# Altium PCB ESP32_BDB.PcbDoc (part 1 of 2)
Units mil, origin at the board's own origin, x right, y up, seen from the top; angles counter-clockwise.
Board outline 3000 x 3000 mil, 4 copper layers (Top Layer, Layer 1, Layer 2, Bottom Layer), stack 62.449 mil thick; 80 components, 64 nets, 287 pads, 205 vias.
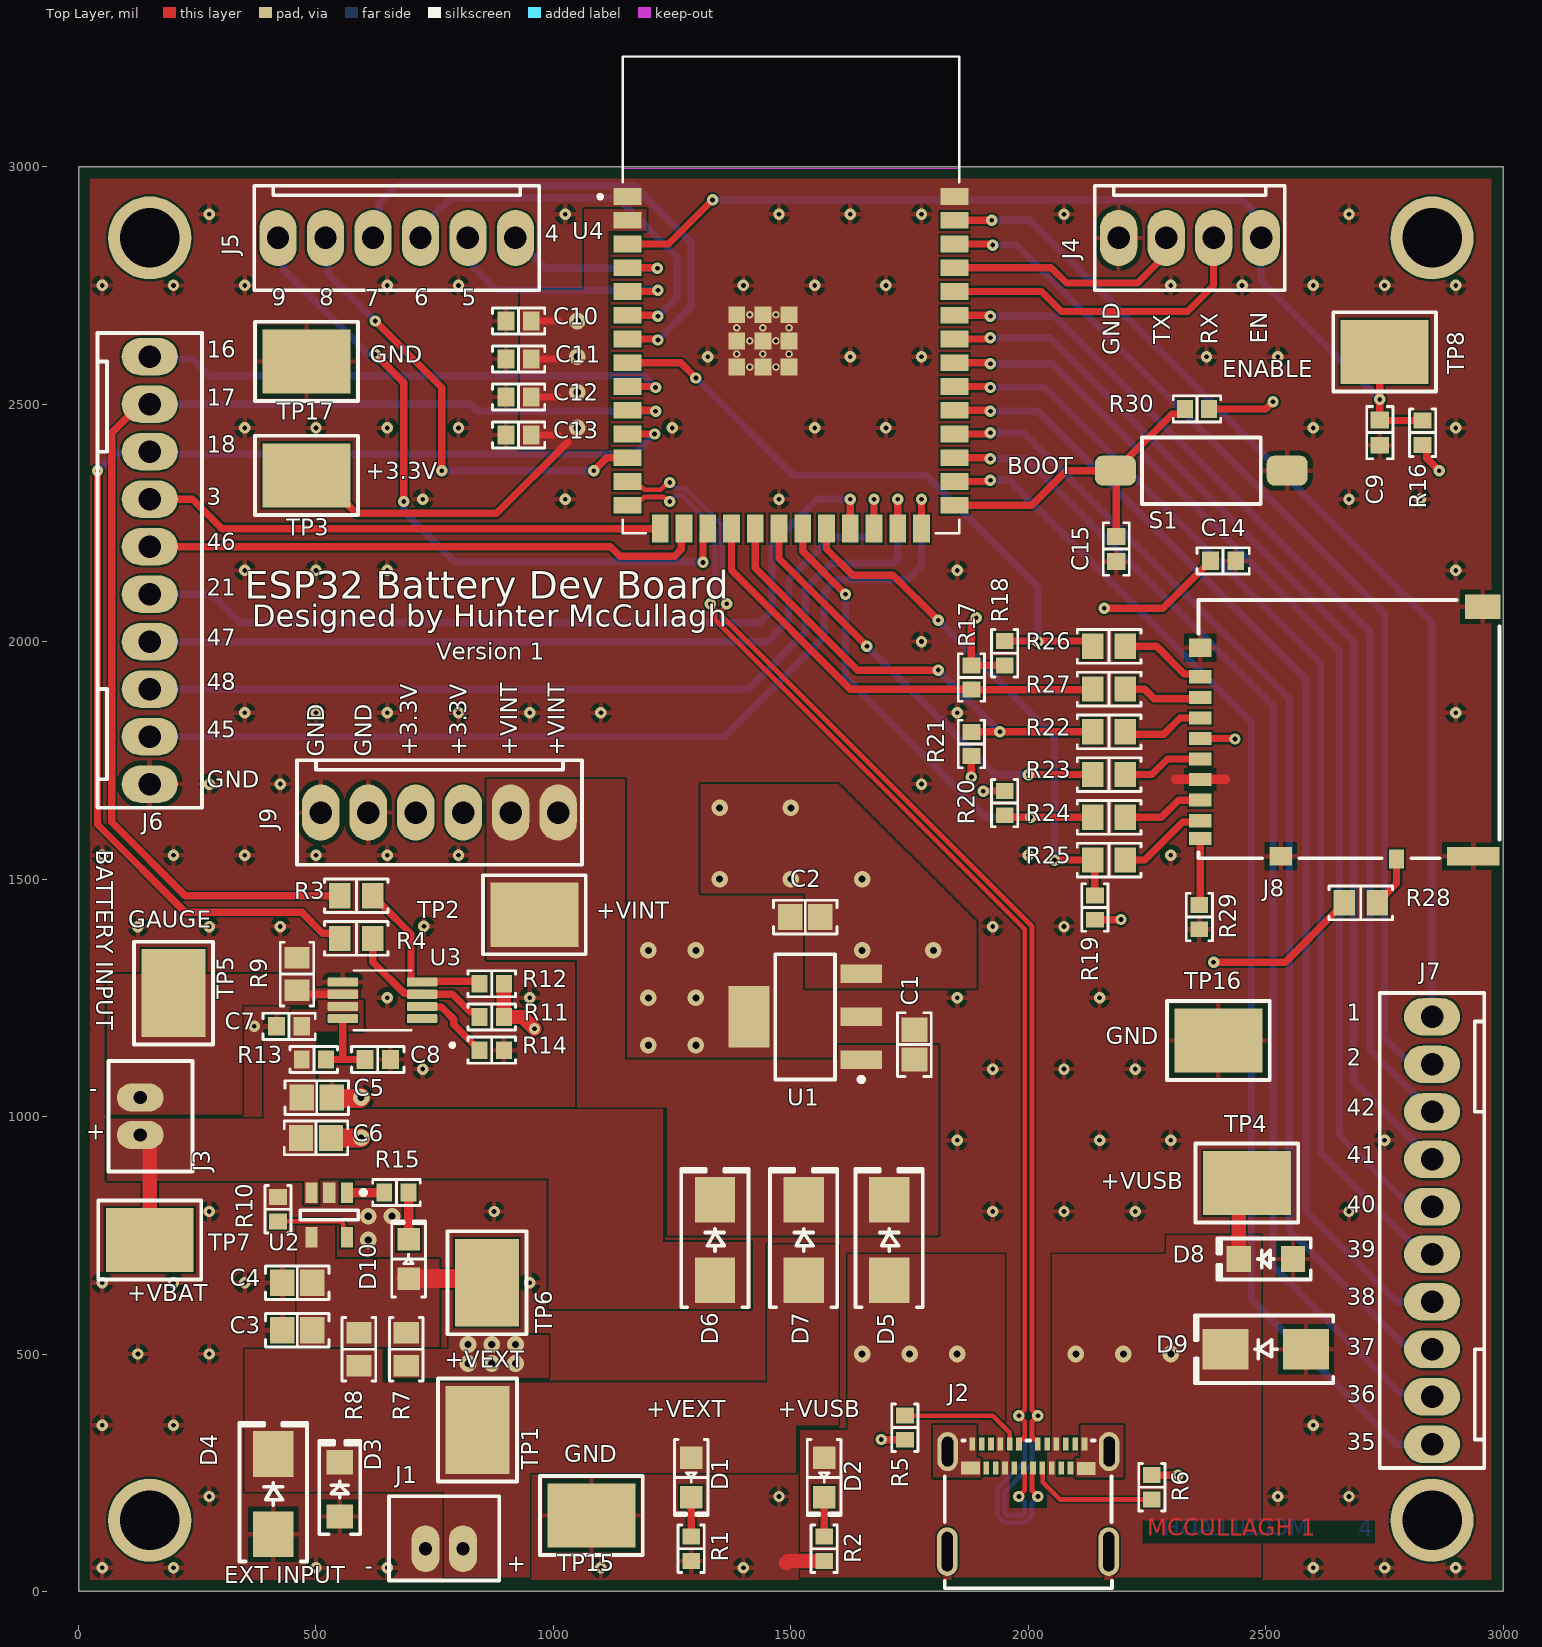
[diagram p0: Top Layer view]
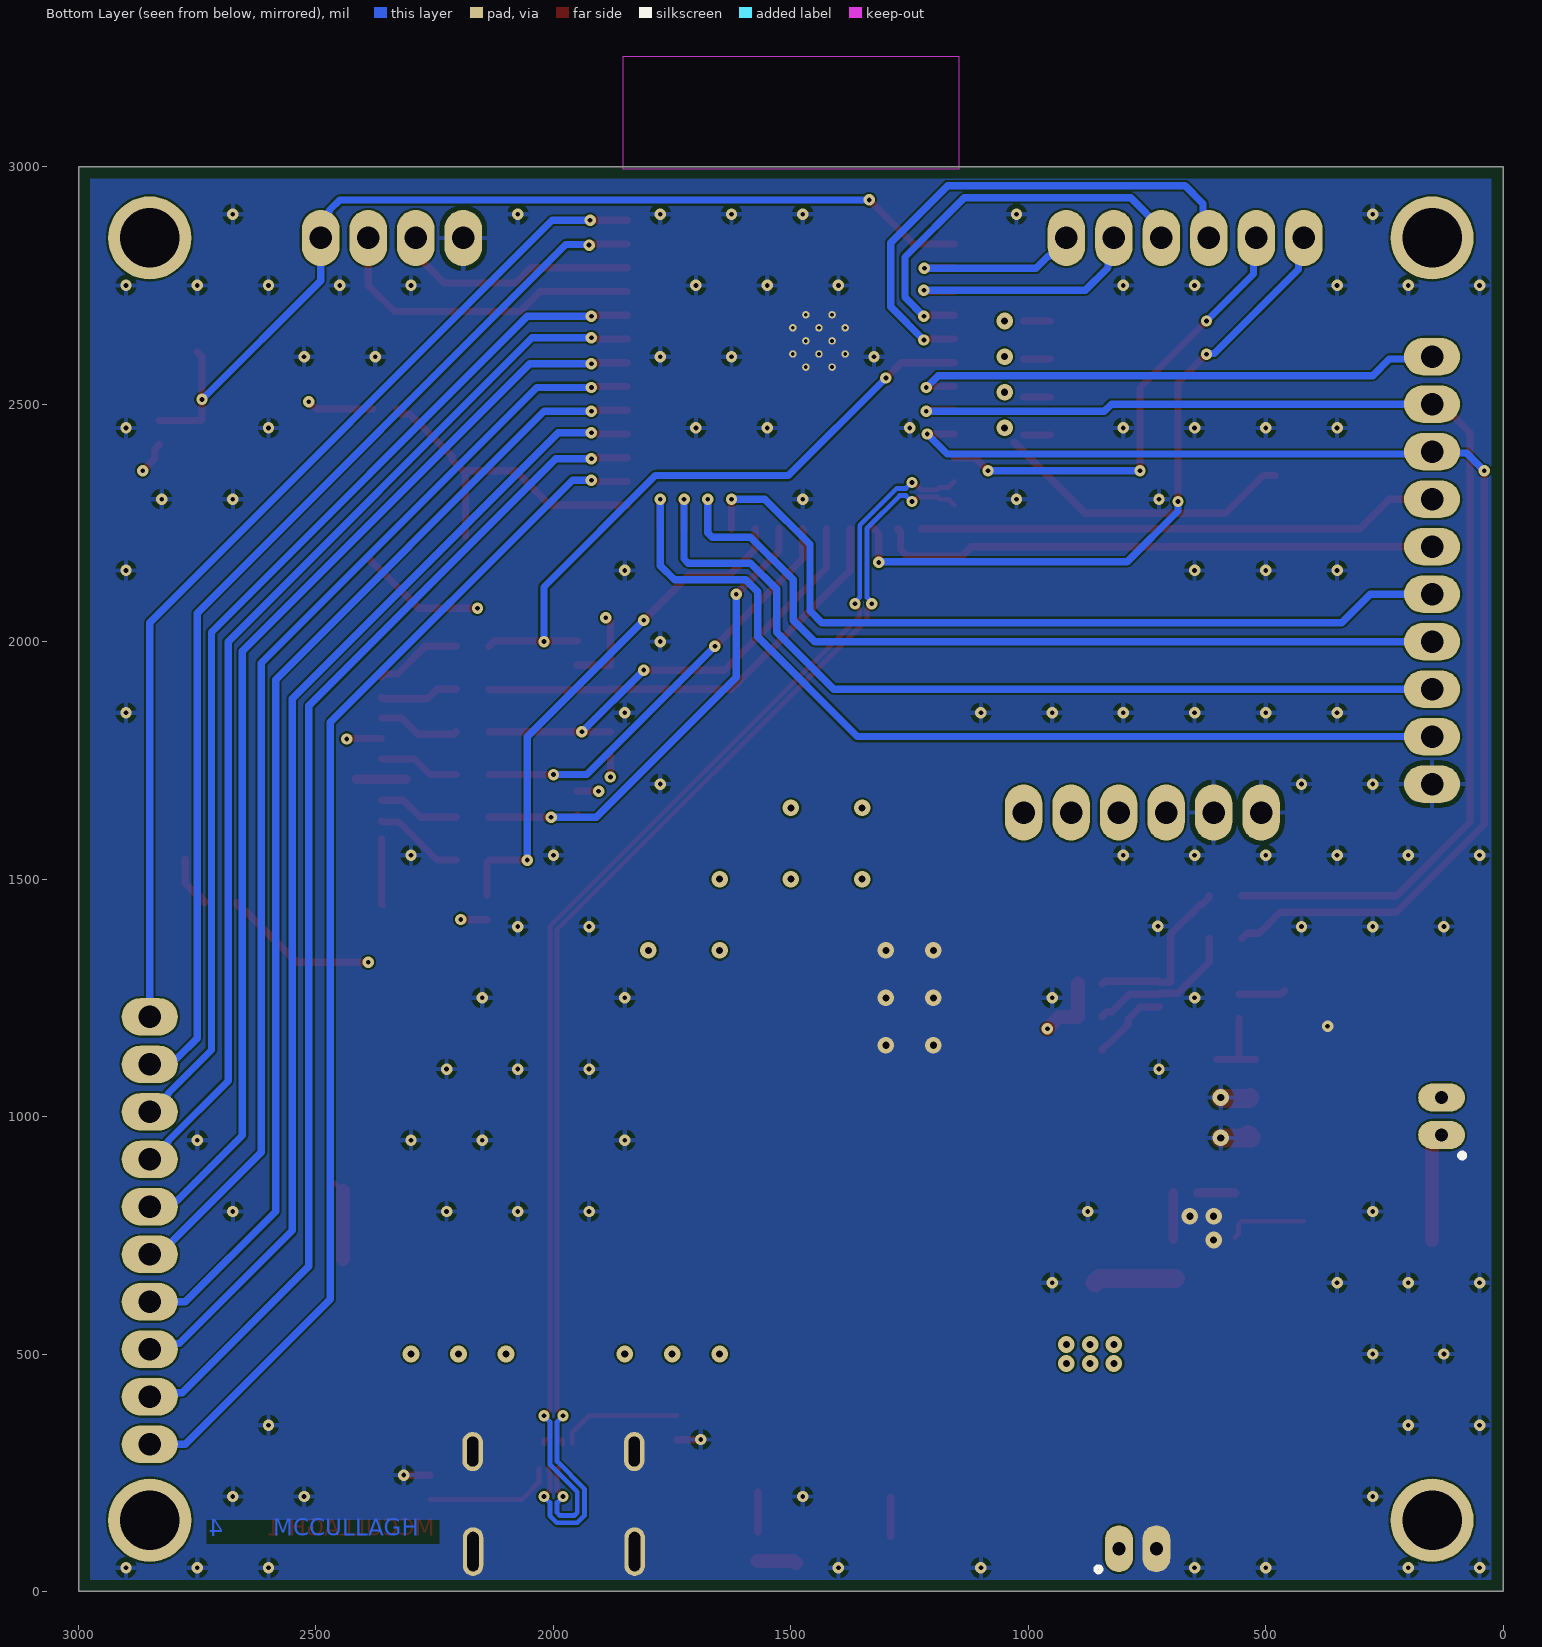
[diagram p1: Bottom Layer view, seen from below]
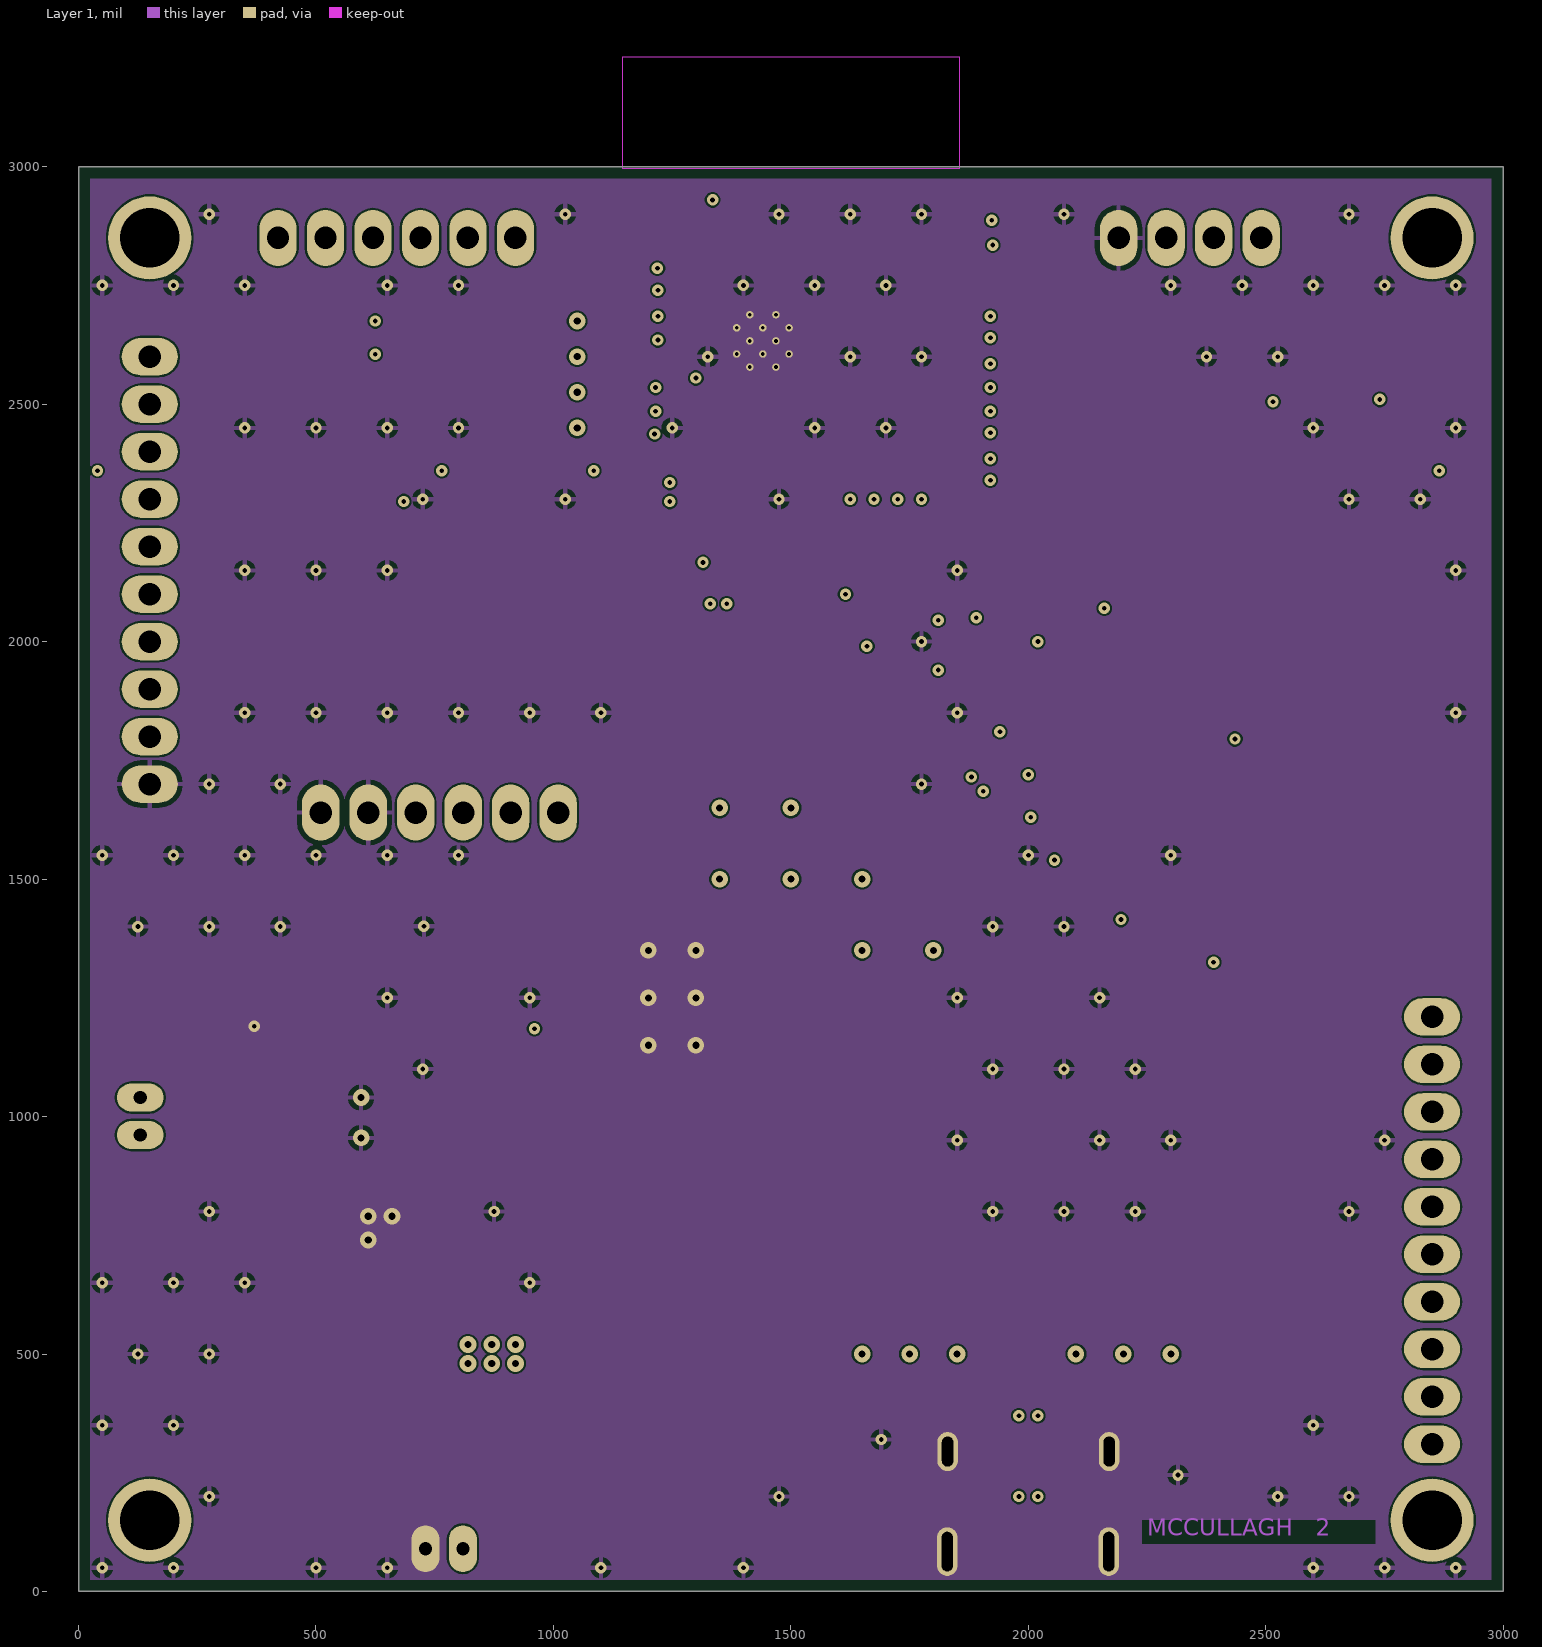
[diagram p2: Layer 1]
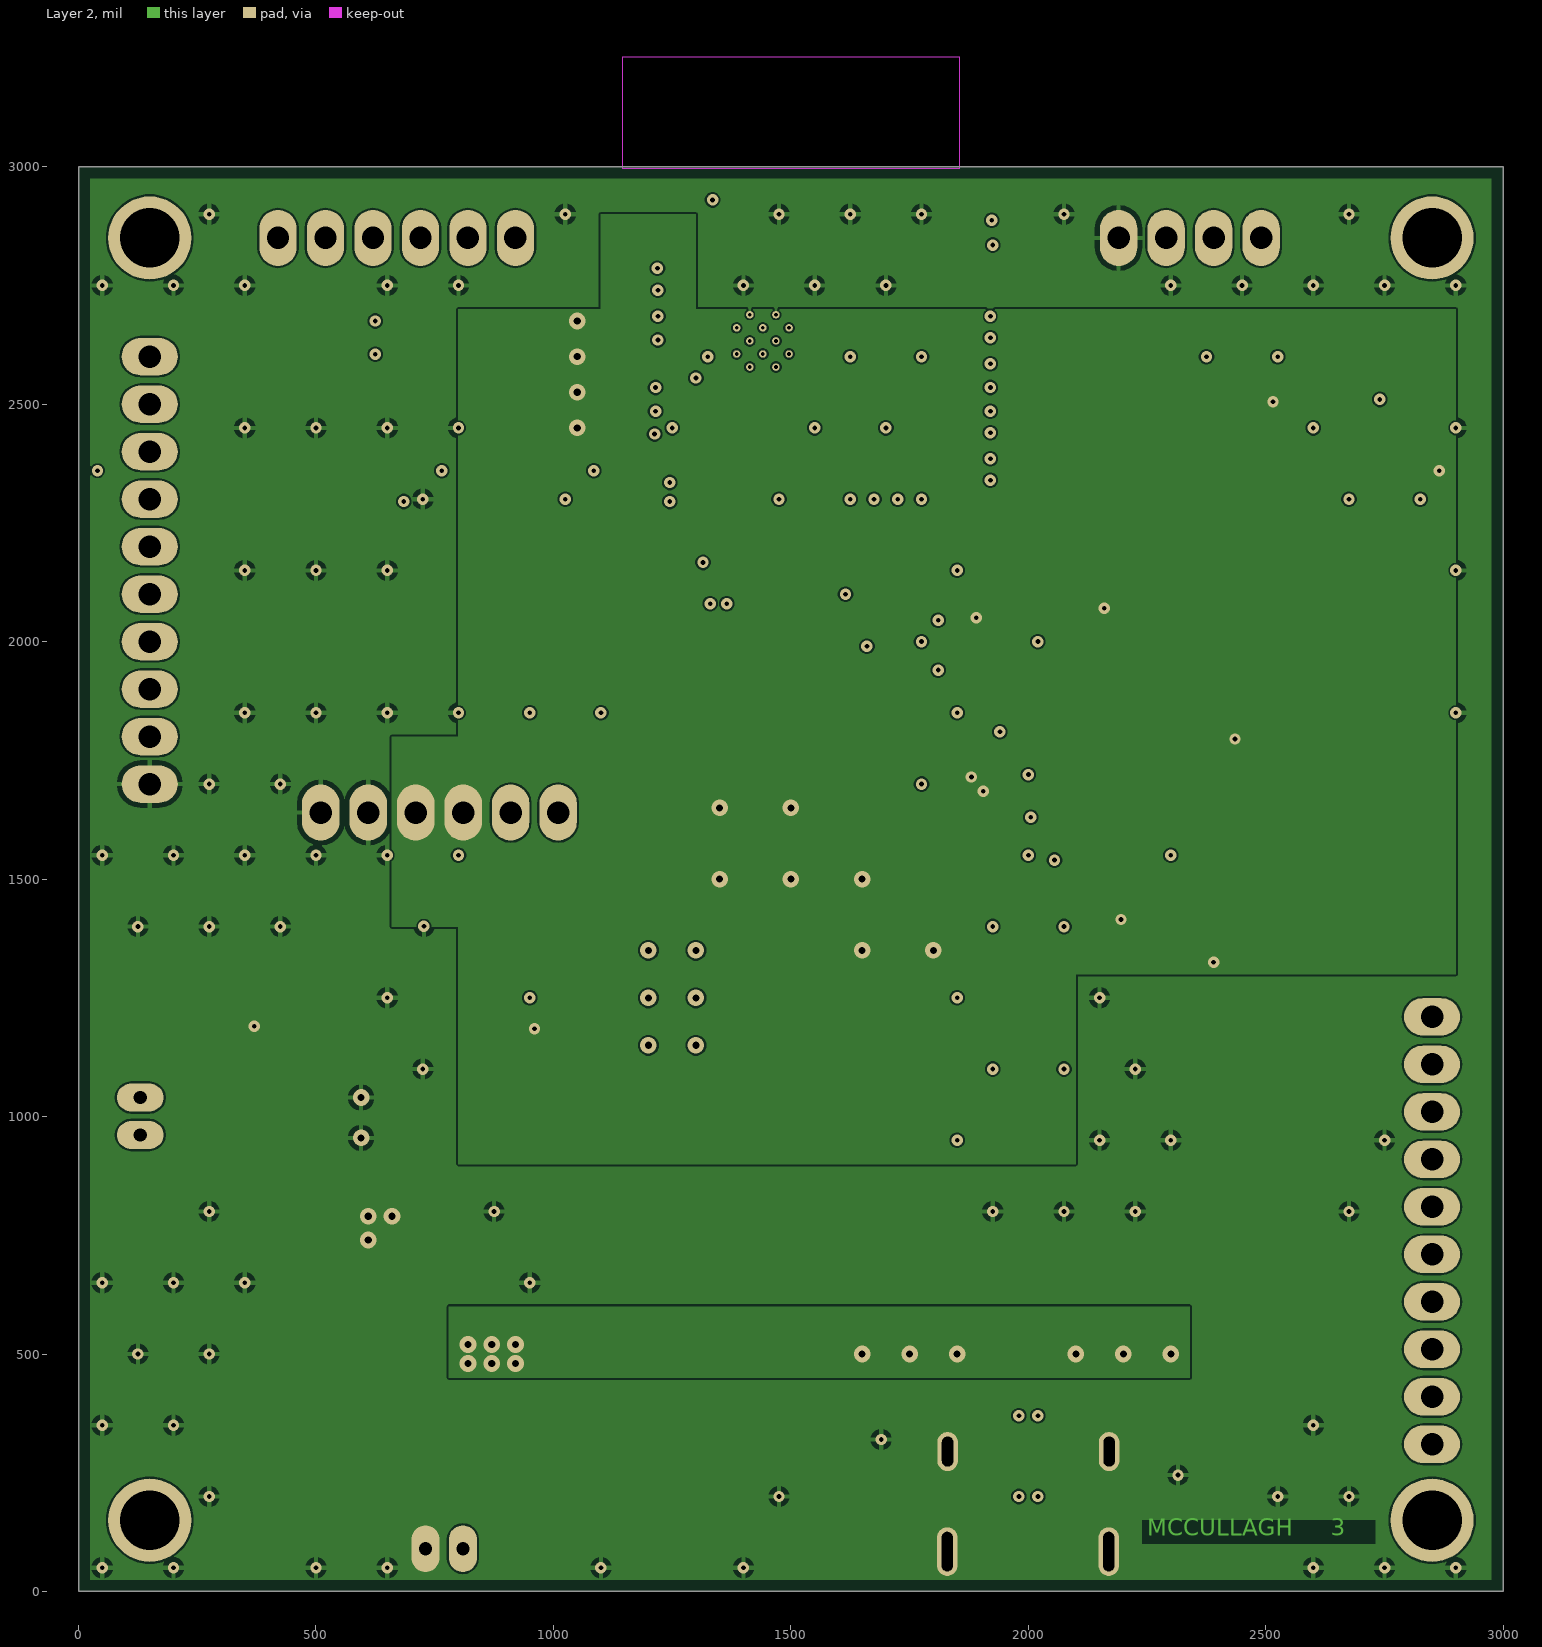
[diagram p3: Layer 2]
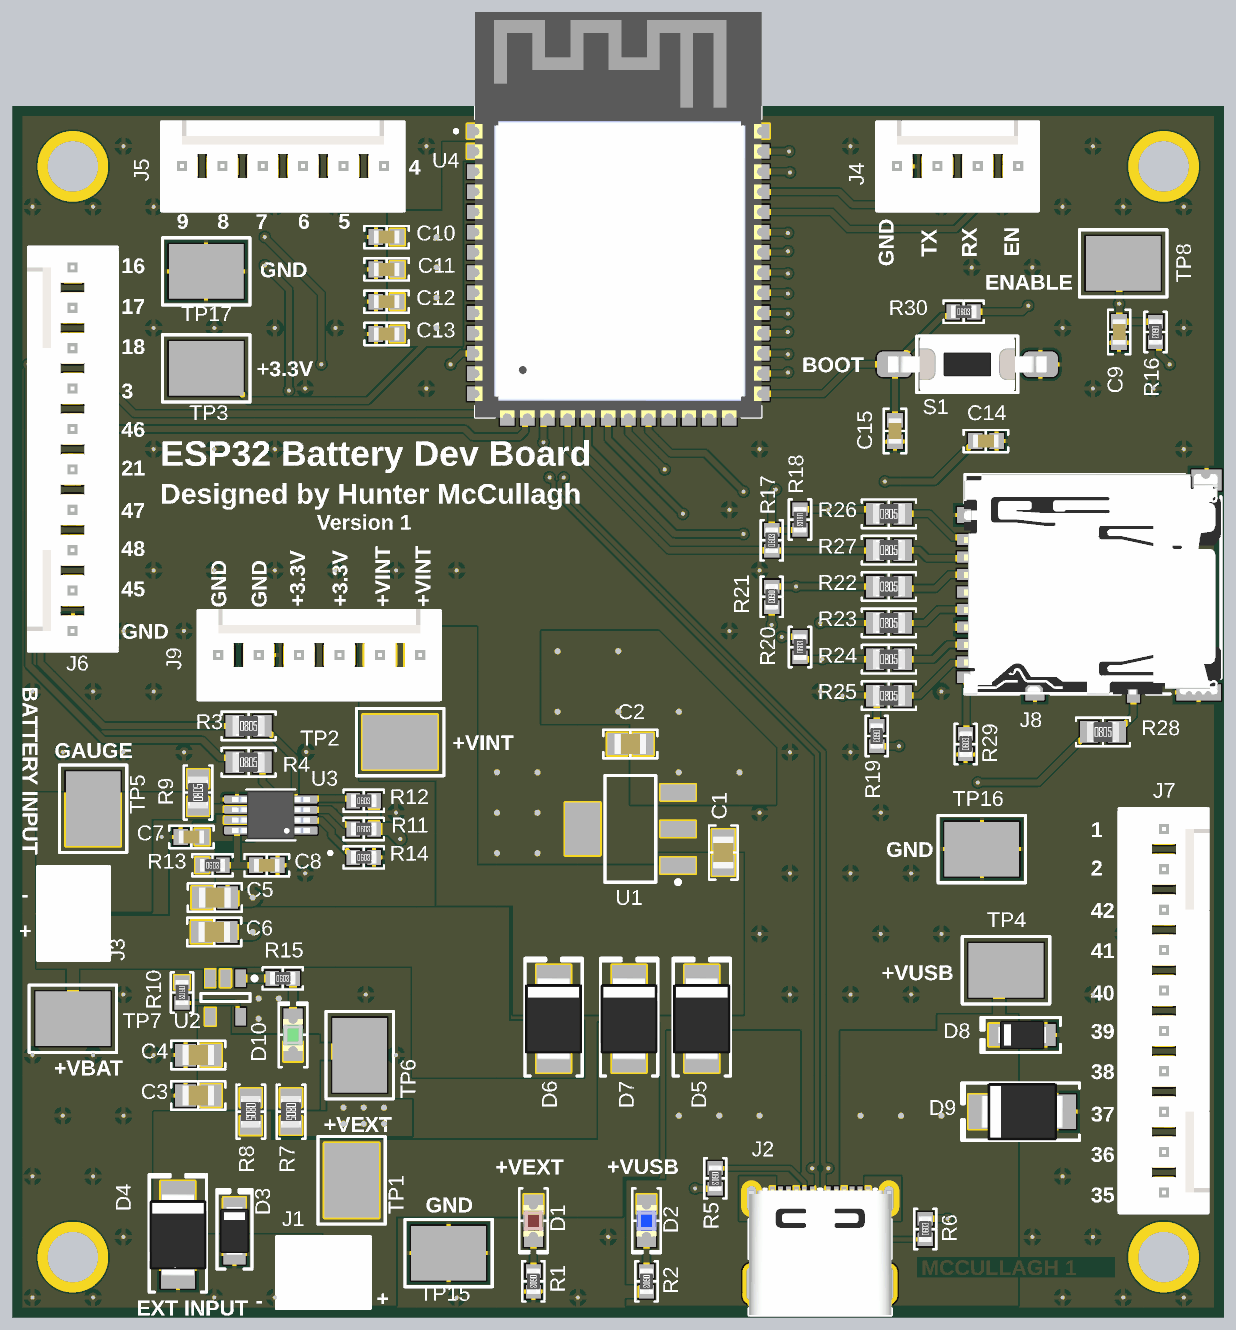
[diagram p4: 3D render of the assembled board from above, using the file's embedded part models]

## Layer stack, top to bottom
Top Solder: solder mask 0.4, Solder Resist, Dk 3.5
Top Layer: signal copper 1.378
Dielectric 2: prepreg 8.284, PP-006, Dk 4.1
Layer 1: signal copper 0.598
Dielectric 1: core 41.929, FR-4, Dk 4.8
Layer 2: signal copper 0.598
Dielectric 3: prepreg 8.284, PP-006, Dk 4.1
Bottom Layer: signal copper 1.378
Bottom Solder: solder mask 0.4, Solder Resist, Dk 3.5

## Board outline
0,0 3000,0 3000,3000 0,3000

## Design rules (kind name [scope] priority, off if disabled: settings)
Clearance [All] p1: gap=5 ignorepadtopadclearanceinfootprint=FALSE except(4: Arc-Poly Track-Poly SMDPad-Poly THPad-Poly Via-Poly Fill-Poly Poly-Poly)
DiffPairsRouting "Schematic Differential Pairs Routing_1" [InNet('D_P')] p1: maxlimit=5 minlimit=5 mostfreqgap=5 toplayer_minwidth=10.26 toplayer_maxwidth=10.26 toplayer_prefwidth=10.26 midlayer1_minwidth=6.27 midlayer1_maxwidth=6.27 midlayer1_prefwidth=6.27 midlayer2_minwidth=6.27 midlayer2_maxwidth=6.27 midlayer2_prefwidth=6.27 bottomlayer_minwidth=10.26 bottomlayer_maxwidth=10.26 bottomlayer_prefwidth=10.26 impedanceprofiledriven=TRUE impedanceprofileid={8AA95D30-BFB7-47B4-9C3E-79D191246514} impedanceprofilevalue=90.000000 maxuncoupledlength=500
DiffPairsRouting "Schematic Differential Pairs Routing" [InNet('D_N')] p2: maxlimit=5 minlimit=5 mostfreqgap=5 toplayer_minwidth=10.26 toplayer_maxwidth=10.26 toplayer_prefwidth=10.26 midlayer1_minwidth=6.27 midlayer1_maxwidth=6.27 midlayer1_prefwidth=6.27 midlayer2_minwidth=6.27 midlayer2_maxwidth=6.27 midlayer2_prefwidth=6.27 bottomlayer_minwidth=10.26 bottomlayer_maxwidth=10.26 bottomlayer_prefwidth=10.26 impedanceprofiledriven=TRUE impedanceprofileid={8AA95D30-BFB7-47B4-9C3E-79D191246514} impedanceprofilevalue=90.000000 maxuncoupledlength=500
DiffPairsRouting [All] p3: maxlimit=10 minlimit=10 mostfreqgap=10 toplayer_minwidth=15 toplayer_maxwidth=15 toplayer_prefwidth=15 midlayer1_minwidth=15 midlayer1_maxwidth=15 midlayer1_prefwidth=15 midlayer2_minwidth=15 midlayer2_maxwidth=15 midlayer2_prefwidth=15 bottomlayer_minwidth=15 bottomlayer_maxwidth=15 bottomlayer_prefwidth=15 maxuncoupledlength=500
HoleSize [All] p1: absolutevalues=TRUE maxlimit=1000 minlimit=1 maxpercent=80.000 minpercent=20.000
MinimumSolderMaskSliver [All] p1: minsoldermaskwidth=1
PolygonConnect PolygonConnect_3 [All vs IsNamedPolygon('GND_L01_P013')] p1: connectstyle=Direct reliefconductorwidth=10 reliefentries=4 polygonreliefangle="90 Angle" airgapwidth=10
PolygonConnect PolygonConnect_2 [All vs IsNamedPolygon('GND_L01_P002')     or          IsNamedPolygon('GND_L01_P003')    or IsNamedPolygon('NETC3_2_L01_P006')       or IsNamedPolygon('BATTERY_GAUGE_L01_P010')] p2: connectstyle=Direct reliefconductorwidth=10 reliefentries=4 polygonreliefangle="90 Angle" airgapwidth=10
PolygonConnect PolygonConnect_1 [All vs InNet('+3v3')  or InNet('+VBAT') or InNet('+VEXT') or InNet('+VUSB') or InNet('+VINT') or InNet('BATTERY_GAUGE')   or InNet('NetC3_2')] p3: connectstyle=Direct reliefconductorwidth=10 reliefentries=4 polygonreliefangle="90 Angle" airgapwidth=10
PolygonConnect [All] p4: connectstyle=Relief reliefconductorwidth=10 reliefentries=4 polygonreliefangle="90 Angle" airgapwidth=10
RoutingVias [All] p1: holewidth=28 width=50 viastyle="Through Hole" minholewidth=28 minwidth=50 maxholewidth=28 maxwidth=50
SilkToSilkClearance [All] p1: silktosilkclearance=1
SilkToSolderMaskClearance [IsPad] p1: minsilkscreentomaskgap=1 clearancetoexposedcopper=TRUE
SolderMaskExpansion [All] p1: expansion=4 istentingtop=FALSE
SupplyNets "Schematic Supply Nets_5" [InNet('GND')] p1: voltage=0.000
SupplyNets "Schematic Supply Nets_4" [InNet('+VINT')] p2: voltage=0.000
SupplyNets "Schematic Supply Nets_3" [InNet('+VUSB')] p3: voltage=0.000
SupplyNets "Schematic Supply Nets_2" [InNet('+3v3')] p4: voltage=0.000
SupplyNets "Schematic Supply Nets_1" [InNet('+VBAT')] p5: voltage=0.000
SupplyNets "Schematic Supply Nets" [InNet('+VEXT')] p6: voltage=0.000
Width "Schematic Width Constraint_5" [InNet('SD_CLK')] p1: maxlimit=15.33 minlimit=11.03 preferedwidth=15.33 toplayer_minwidth=15.33 midlayer1_maxwidth=11.03 midlayer1_prefwidth=11.03 midlayer2_maxwidth=11.03 midlayer2_prefwidth=11.03 bottomlayer_minwidth=15.33 impedanceprofiledriven=TRUE impedanceprofileid={495962F6-A0E2-49EB-9F0F-8B6C4B1E71A1} impedanceprofilevalue=50.000000 minimp=50.000000 maximp=50.000000 favimp=50.000000
Width "Schematic Width Constraint_4" [InNet('DAT2')] p2: maxlimit=15.33 minlimit=11.03 preferedwidth=15.33 toplayer_minwidth=15.33 midlayer1_maxwidth=11.03 midlayer1_prefwidth=11.03 midlayer2_maxwidth=11.03 midlayer2_prefwidth=11.03 bottomlayer_minwidth=15.33 impedanceprofiledriven=TRUE impedanceprofileid={495962F6-A0E2-49EB-9F0F-8B6C4B1E71A1} impedanceprofilevalue=50.000000 minimp=50.000000 maximp=50.000000 favimp=50.000000
Width "Schematic Width Constraint_3" [InNet('DAT1')] p3: maxlimit=15.33 minlimit=11.03 preferedwidth=15.33 toplayer_minwidth=15.33 midlayer1_maxwidth=11.03 midlayer1_prefwidth=11.03 midlayer2_maxwidth=11.03 midlayer2_prefwidth=11.03 bottomlayer_minwidth=15.33 impedanceprofiledriven=TRUE impedanceprofileid={495962F6-A0E2-49EB-9F0F-8B6C4B1E71A1} impedanceprofilevalue=50.000000 minimp=50.000000 maximp=50.000000 favimp=50.000000
Width "Schematic Width Constraint_2" [InNet('SD_MISO')] p4: maxlimit=15.33 minlimit=11.03 preferedwidth=15.33 toplayer_minwidth=15.33 midlayer1_maxwidth=11.03 midlayer1_prefwidth=11.03 midlayer2_maxwidth=11.03 midlayer2_prefwidth=11.03 bottomlayer_minwidth=15.33 impedanceprofiledriven=TRUE impedanceprofileid={495962F6-A0E2-49EB-9F0F-8B6C4B1E71A1} impedanceprofilevalue=50.000000 minimp=50.000000 maximp=50.000000 favimp=50.000000
Width "Schematic Width Constraint_1" [InNet('SD_CS')] p5: maxlimit=15.33 minlimit=11.03 preferedwidth=15.33 toplayer_minwidth=15.33 midlayer1_maxwidth=11.03 midlayer1_prefwidth=11.03 midlayer2_maxwidth=11.03 midlayer2_prefwidth=11.03 bottomlayer_minwidth=15.33 impedanceprofiledriven=TRUE impedanceprofileid={495962F6-A0E2-49EB-9F0F-8B6C4B1E71A1} impedanceprofilevalue=50.000000 minimp=50.000000 maximp=50.000000 favimp=50.000000
Width "Schematic Width Constraint" [InNet('SD_MOSI')] p6: maxlimit=15.33 minlimit=11.03 preferedwidth=15.33 toplayer_minwidth=15.33 midlayer1_maxwidth=11.03 midlayer1_prefwidth=11.03 midlayer2_maxwidth=11.03 midlayer2_prefwidth=11.03 bottomlayer_minwidth=15.33 impedanceprofiledriven=TRUE impedanceprofileid={495962F6-A0E2-49EB-9F0F-8B6C4B1E71A1} impedanceprofilevalue=50.000000 minimp=50.000000 maximp=50.000000 favimp=50.000000
Width [All] p7: maxlimit=500 minlimit=2 preferedwidth=10
25 further rules are at their usual default settings.

## Classes and differential pairs
component class ESP32_BDB-2: C9 C10 C11 C12 C13 C14 C15 J4 J5 J6 J7 J8 J9 R16 R17 R18 R19 R20 R21 R22 R23 R24 R25 R26 R27 R28 R29 R30 S1 TP8 U4
component class ESP32_BDB-1: C1 C2 C3 C4 C5 C6 C7 C8 D1 D2 D3 D4 D5 D6 D7 D8 D9 D10 J1 J2 J3 R1 R2 R3 R4 R5 R6 R7 R8 R9 R10 R11 R12 R13 R14 R15 TP1 TP2 TP3 TP4 TP5 TP6 TP7 TP15 TP16 TP17 U1 U2 U3
differential pair D: +D_P -D_N

## Components (designator, comment, footprint, x,y, rotation, side; value= is the part's Value field where it differs from the comment)
C1 "2.2 µF" "CAP 0805_2012" 1760,1151.5 r270 top
C2 "1 µF" "CAP 0805_2012" 1530,1420 r0 top
C3 "4.7 µF" "CAP 0805_2012" 460.38,550 r0 top
C4 "4.7 µF" "CAP 0805_2012" 460.38,650 r0 top
C5 "4.7 µF" "CAP 0805_2012" 501.5,1040 r180 top
C6 "4.7 µF" "CAP 0805_2012" 500,955 r180 top
C7 "2.2 µF" "CAP 0603_1608" 443.43,1190 r0 top
C8 "0.22 µF" "CAP 0603_1608" 630,1120 r180 top
C9 "0.1 µF" "CAP 0603_1608" 2740,2440 r90 top
C10 "1 µF" "CAP 0603_1608" 926.57,2675 r0 top
C11 "0.1 µF" "CAP 0603_1608" 926.57,2595 r0 top
C12 "0.1 µF" "CAP 0603_1608" 926.57,2515 r0 top
C13 "0.1 µF" "CAP 0603_1608" 926.57,2435 r0 top
C14 "0.1 µF" "CAP 0603_1608" 2410,2170 r180 top
C15 "0.1 µF" "CAP 0603_1608" 2185,2195 r90 top
D1 "Red" "LED 0805_2012 RED" 1290,240 r270 top
D2 "Blue" "LED 0805_2012 BLUE" 1570,240 r270 top
D3 "VTVS5V0ASMF-HM3-08" "SMF DO-219AB" 550,215 r90 top
D4 "SS22" "DO214AA SMB" 410,205 r90 top
D5 "SS22" "DO214AA SMB" 1706.85,740 r90 top
D6 "SS22" "DO214AA SMB" 1340,740 r90 top
D7 "SS22" "DO214AA SMB" 1526.85,740 r90 top
D8 "VTVS5V0ASMF-HM3-08" "SMF DO-219AB" 2500,700 r180 top
D9 "SS22" "DO214AA SMB" 2500,510 r180 top
D10 "Green" "LED 0805_2012 GREEN" 695,700 r90 top
J1 "B2B-PH-K-S(LF)(SN)" "JST B2B-PH-K" 770,90 r180 top
J2 "1054500101" "Molex 1054500101" 2000,285 r0 top locked
J3 "B2B-PH-K-S(LF)(SN)" "JST B2B-PH-K" 130,1000.63 r90 top
J4 "0022272041" "MOLEX KK 0022272041" 2340,2850 r180 top
J5 "0022272061" "MOLEX KK 0022272061" 670,2850 r180 top
J6 "0022272101" "MOLEX KK 0022272101" 150,2150 r270 top
J7 "0022272101" "MOLEX KK 0022272101" 2850,760 r90 top
J8 "DM3AT-SF-PEJM5" "HIROSE DM3AT-SF-PEJM5" 2670,1800 r90 top
J9 "0022272061" "MOLEX KK 0022272061" 760,1640 r180 top
R1 "470Ω" "RES 0603_1608" 1290,90 r270 top value="470 Ohms"
R2 "470Ω" "RES 0603_1608" 1570,90 r270 top value="470 Ohms"
R3 "0Ω" "RES 0805_2012" 585,1465 r0 top value="0 Ohms"
R4 "0Ω" "RES 0805_2012" 585,1375 r0 top value="0 Ohms"
R5 "5.1kΩ" "RES 0603_1608" 1740,345 r270 top value="5.1 kOhms"
R6 "5.1kΩ" "RES 0603_1608" 2260,219.41 r90 top value="5.1 kOhms"
R7 "0Ω" "RES 0805_2012" 690,510 r270 top value="0 Ohms"
R8 "0Ω" "RES 0805_2012" 590.38,510 r270 top value="0 Ohms"
R9 "50mΩ" "RES 0805_2012" 460,1300 r90 top value="50 mOhms"
R10 "2kΩ" "RES 0603_1608" 420,805 r270 top value="2 kOhms"
R11 "10kΩ" "RES 0603_1608" 870,1209.62 r0 top value="10 kOhms"
R12 "10kΩ" "RES 0603_1608" 870,1279.62 r0 top value="10 kOhms"
R13 "1kΩ" "RES 0603_1608" 495.59,1120 r0 top value="1 kOhms"
R14 "200kΩ" "RES 0603_1608" 870,1139.62 r0 top value="200 kOhms"
R15 "470Ω" "RES 0603_1608" 669.41,840 r0 top value="470 Ohms"
R16 "10kΩ" "RES 0603_1608" 2830,2440 r270 top value="10 kOhms"
R17 "47kΩ" "RES 0603_1608" 1880,1924.41 r90 top value="47 kOhms"
R18 "47kΩ" "RES 0603_1608" 1950,1975.59 r270 top value="47 kOhms"
R19 "47kΩ" "RES 0603_1608" 2140,1440 r270 top value="47 kOhms"
R20 "47kΩ" "RES 0603_1608" 1950,1660 r90 top value="47 kOhms"
R21 "47kΩ" "RES 0603_1608" 1880,1784.41 r270 top value="47 kOhms"
R22 "0Ω" "RES 0805_2012" 2170,1810 r0 top value="0 Ohms"
R23 "0Ω" "RES 0805_2012" 2170,1720 r0 top value="0 Ohms"
R24 "0Ω" "RES 0805_2012" 2170,1630 r0 top value="0 Ohms"
R25 "0Ω" "RES 0805_2012" 2170,1540 r0 top value="0 Ohms"
R26 "0Ω" "RES 0805_2012" 2170,1990 r0 top value="0 Ohms"
R27 "0Ω" "RES 0805_2012" 2170,1900 r0 top value="0 Ohms"
R28 "0Ω" "RES 0805_2012" 2700,1450 r0 top value="0 Ohms"
R29 "10kΩ" "RES 0603_1608" 2360,1420 r90 top value="10 kOhms"
R30 "10kΩ" "RES 0603_1608" 2355,2490 r0 top value="10 kOhms"
S1 "FSMSMTR" "TE FSMSMTR" 2364.09,2360 r180 top
TP1 "5016" KEYSTONE-5016_V 840,340 r90 top
TP2 "5016" KEYSTONE-5016_V 960,1425 r0 top
TP3 "5016" KEYSTONE-5016_V 480,2350 r0 top
TP4 "5016" KEYSTONE-5016_V 2460,860 r0 top
TP5 "5016" KEYSTONE-5016_V 200,1260 r90 top
TP6 "5016" KEYSTONE-5016_V 860,650 r270 top
TP7 "5016" KEYSTONE-5016_V 150,740 r0 top
TP8 "5016" KEYSTONE-5016_V 2750,2610 r0 top
TP15 "5016" KEYSTONE-5016_V 1080,160 r0 top
TP16 "5016" KEYSTONE-5016_V 2400,1160 r0 top
TP17 "5016" KEYSTONE-5016_V 480,2590 r0 top
U1 "MCP1825S-3302E/DB" SOT-223-DB3_N 1530,1210 r180 top
U2 "MCP73831T-4ADI/OT" SOT-23-OT5_N 527.78,792.76 r270 top
U3 "STC3100IST" SOIC65P490X110-8N 640,1244.62 r180 top
U4 "ESP32-S3-WROOM-1-N4R2" XCVR_ESP32-S3-WROOM-1-N4R2 1500,2730 r0 top locked

## Footprints (in the part's own frame and the unit in brackets; to place one, negate y for a bottom-side part, rotate by r counter-clockwise, add the part's x,y. Pads: shape width x height; smd on the part's side, far side on the other; paste and mask are expansions set on the pad)
"CAP 0603_1608" [mm] "Chip Capacitor, 2-Leads, Body 1.60x0.80mm, IPC Medium Density"
  rect 0.9x1 smd: 1(-0.675,0) 2(0.675,0)
  silkscreen extent -1.4,-0.7 1.4,0.7, body extent -0.8,-0.41 0.8,0.41, height 0.82
"CAP 0805_2012" [mm] "Chip Capacitor, 2-Leads, Body 2.00x1.20mm, IPC Medium Density"
  rect 1.3x1.4 smd: 1(-0.8,0) 2(0.8,0)
  silkscreen extent -1.7,-0.9 1.7,0.9, body extent -1,-0.64 1,0.64, height 1.26
"DO214AA SMB" [mm] "Molded Diode, 2-Leads, Body 4.31x3.62mm, IPC Medium Density"
  rect 2.45x2.15 smd: 1(-2.15,0) 2(2.15,0)
  silkscreen extent -3.6,-1.8 3.8,1.8, body extent -2.6,-1.8 2.6,1.8, height 2.4
"HIROSE DM3AT-SF-PEJM5" [mm]
  rect 0.7x1.2 smd: 1(3.2,7.825) 2(2.1,7.825) 3(1,7.825) 4(-0.1,7.825) 5(-1.2,7.825) 6(-2.3,7.825) 7(-3.4,7.825) 8(-4.5,7.825) 9(-5.45,7.825)
  rect 1x0.8 smd: 10(-6.55,-2.675)
  rect 1x1.2 smd: S(-6.4,3.525) S(4.75,7.825)
  rect 1x2.8 smd: S(-6.4,-6.775)
  rect 1.3x1.9 smd: S(6.95,-7.275)
  silkscreen extent -6.5,-8.18 7.3,7.93, body extent -6.52,-8.18 7.32,7.97, height 1.68
"JST B2B-PH-K" [mm]
  oval 1.5x2.5 hole 0.7: 1(-1,0) 2(1,0)
  silkscreen extent -2.95,-2.8 2.95,1.7, body extent -2.95,-2.8 2.95,1.7, height 6
KEYSTONE-5016_V [mm] "Testpoint, Body 3.81x2.04 mm"
  rect 4.7x3.43 smd: 1(0,0)
  silkscreen extent -2.75,-2.12 2.75,2.11, body extent -1.9,-1.02 1.9,1.02, height 2.29
"LED 0805_2012 BLUE" [mm] "Chip Diode, 2-Leads, Body 2.00x1.25mm, IPC Medium Density"
  rect 1.2x1.2 smd: 1(-1.05,0) 2(1.05,0)
  silkscreen extent -2.03,-0.9 2.03,0.9, body extent -1,-0.62 1,0.63, height 0.9
"LED 0805_2012 GREEN" [mm] "Chip Diode, 2-Leads, Body 2.00x1.25mm, IPC Medium Density"
  rect 1.2x1.2 smd: 1(-1.05,0) 2(1.05,0)
  silkscreen extent -2.03,-0.9 2.03,0.9, body extent -1,-0.62 1,0.63, height 0.9
"LED 0805_2012 RED" [mm] "Chip Diode, 2-Leads, Body 2.00x1.25mm, IPC Medium Density"
  rect 1.2x1.2 smd: 1(-1.05,0) 2(1.05,0)
  silkscreen extent -2.03,-0.9 2.03,0.9, body extent -1,-0.62 1,0.63, height 0.9
"Molex 1054500101" [mm] "USB-C Receptacle Connector 24 Position Surface Mount, 24 Position, Body 8.94x7.90mm"
  rect 0.3x0.7 smd: A1(-3,0.655) A2(-2.5,0.655) A3(-2,0.655) A4(-1.5,0.655) A5(-1,0.655) A6(-0.5,0.655) A7(0.5,0.655) A8(1,0.655) A9(1.5,0.655) A10(2,0.655) A11(2.5,0.655) A12(3,0.655) B2(2.25,-0.645) B3(1.75,-0.645) B4(1.25,-0.645) B5(0.75,-0.645) B6(0.25,-0.645) B7(-0.25,-0.645) B8(-0.75,-0.645) B9(-1.25,-0.645) B10(-1.75,-0.645) B11(-2.25,-0.645)
  rect 1x0.7 smd: B1(3.1,-0.655) B12(-3.1,-0.645)
  oval 1.1x2.6 hole 2.1 slot 0.6 at 0 deg: S(-4.34,-5.105) S(4.3,-5.105)
  oval 1.1x2.1 hole 1.6 slot 0.6 at 0 deg: S(-4.32,0.245) S(4.32,0.245)
  silkscreen extent -4.47,-7.07 4.47,0.83, body extent -4.47,-7.06 4.47,0.84, height 3.21
"MOLEX KK 0022272041" [mm]
  oval 2x3 hole 1.2: 1(-3.81,0) 2(-1.27,0) 3(1.27,0) 4(3.81,0)
  silkscreen extent -5.08,-2.79 5.08,2.79, body extent -5.08,-2.9 5.08,2.9, height 11.7
"MOLEX KK 0022272061" [mm]
  oval 2x3 hole 1.2: 1(-6.35,0) 2(-3.81,0) 3(-1.27,0) 4(1.27,0) 5(3.81,0) 6(6.35,0)
  silkscreen extent -7.62,-2.79 7.62,2.79, body extent -7.62,-2.9 7.62,2.9, height 11.7
"MOLEX KK 0022272101" [mm]
  oval 2x3 hole 1.2: 1(-11.43,0) 2(-8.89,0) 3(-6.35,0) 4(-3.81,0) 5(-1.27,0) 6(1.27,0) 7(3.81,0) 8(6.35,0) 9(8.89,0) 10(11.43,0)
  silkscreen extent -12.7,-2.79 12.7,2.79, body extent -12.7,-2.9 12.7,2.9, height 11.7
"RES 0603_1608" [mm] "Chip Resistor, 2-Leads, Body 1.60x0.80mm, IPC Medium Density"
  rect 0.85x0.95 smd: 1(-0.65,0) 2(0.65,0)
  silkscreen extent -1.27,-0.7 1.27,0.7, body extent -0.8,-0.4 0.8,0.4, height 0.45
"RES 0805_2012" [mm] "Chip Resistor, 2-Leads, Body 2.00x1.25mm, IPC Medium Density"
  rect 1.15x1.35 smd: 1(-0.875,0) 2(0.875,0)
  silkscreen extent -1.7,-0.9 1.7,0.9, body extent -1,-0.62 1,0.63, height 0.6
"SMF DO-219AB" [mm] "Molded Diode, 2-Leads, Body 3.90x1.90mm, IPC Medium Density"
  rect 1.3x1.4 smd: 1(-1.45,0) 2(1.45,0)
  silkscreen extent -2.4,-1.1 2.59,1.1, body extent -1.5,-0.9 1.5,0.9, height 1.18
SOIC65P490X110-8N [mm]
  rrect25% 1.62x0.49 smd: 1(-2.12,0.975) 2(-2.12,0.325) 3(-2.12,-0.325) 4(-2.12,-0.975) 5(2.12,-0.975) 6(2.12,-0.325) 7(2.12,0.325) 8(2.12,0.975)
  silkscreen extent -3.84,-1.6 1.55,2.49, body extent -2.45,-1.5 2.45,1.5, height 1.1
SOT-23-OT5_N [mm] "SOT23, 5-Leads, Body 2.9x1.7mm, Pitch 0.95mm, Lead Span 2.8mm, IPC Medium Density"
  rect 1.1x0.65 smd: 1(-1.2,0.95) 2(-1.2,0) 3(-1.2,-0.95) 4(1.2,-0.95) 5(1.2,0.95)
  silkscreen extent -1.32,-1.55 0.25,1.95, body extent -0.9,-1.55 0.9,1.55, height 1.45
SOT-223-DB3_N [mm] "SOT223, 4-Leads, Body 6.5x3.5mm, Pitch 2.3mm, Lead Span 7mm, IPC Medium Density"
  rect 2.2x1 smd: 1(-3,2.3) 2(-3,0) 3(-3,-2.3)
  rect 2.2x3.3 smd: 4(3,0)
  silkscreen extent -3.13,-3.35 1.6,3.47, body extent -1.85,-3.35 1.85,3.35, height 1.8
"TE FSMSMTR" [mm]
  rrect50% 2.19x1.6 smd: 1(-4.595,0) 2(4.595,0)
  silkscreen extent -3.18,-1.78 3.18,1.78, body extent -4.98,-1.75 4.98,1.75, height 4.42
XCVR_ESP32-S3-WROOM-1-N4R2 [mm]
  rect 1.5x0.9 smd: 1(-8.75,5.26) 2(-8.75,3.99) 3(-8.75,2.72) 4(-8.75,1.45) 5(-8.75,0.18) 6(-8.75,-1.09) 7(-8.75,-2.36) 8(-8.75,-3.63) 9(-8.75,-4.9) 10(-8.75,-6.17) 11(-8.75,-7.44) 12(-8.75,-8.71) 13(-8.75,-9.98) 14(-8.75,-11.25) 27(8.75,-11.25) 28(8.75,-9.98) 29(8.75,-8.71) 30(8.75,-7.44) 31(8.75,-6.17) 32(8.75,-4.9) 33(8.75,-3.63) 34(8.75,-2.36) 35(8.75,-1.09) 36(8.75,0.18) 37(8.75,1.45) 38(8.75,2.72) 39(8.75,3.99) 40(8.75,5.26)
  rect 0.9x1.5 smd: 15(-6.985,-12.5) 16(-5.715,-12.5) 17(-4.445,-12.5) 18(-3.175,-12.5) 19(-1.905,-12.5) 20(-0.635,-12.5) 21(0.635,-12.5) 22(1.905,-12.5) 23(3.175,-12.5) 24(4.445,-12.5) 25(5.715,-12.5) 26(6.985,-12.5)
  rect 0.9x0.9 smd: 41_1(-1.5,-2.46) 41_2(-2.9,-2.46) 41_3(-0.1,-2.46) 41_4(-2.9,-3.86) 41_5(-1.5,-3.86) 41_6(-0.1,-3.86) 41_7(-2.9,-1.06) 41_8(-1.5,-1.06) 41_9(-0.1,-1.06)
  round 0.4 hole 0.2 mask+0: 41_10(-1.5,-1.76) 41_11(-2.9,-1.76) 41_12(-0.1,-1.76) 41_13(-2.9,-3.16) 41_14(-1.5,-3.16) 41_15(-0.1,-3.16) 41_16(-2.2,-1.06) 41_17(-0.8,-1.06) 41_18(-2.2,-2.46) 41_19(-0.8,-2.46) 41_20(-2.2,-3.86) 41_21(-0.8,-3.86)
  Keep-Out Layer region: 9,6.75 -9,6.75 -9,12.75 9,12.75
  Keep-Out Layer region: 9,6.75 -9,6.75 -9,12.75 9,12.75
  silkscreen extent -10.3,-12.75 9,12.75, body extent -9,-12.75 9,12.75, height 3.25

## Part data
C1: library part 0805B225K250CT, "CAP CER 2.2UF 25V X7R 0805", Device Package="0805 (2012 Metric)", Manufacturer="Walsin Technology Corporation", Operating Temperature="-55°C ~ 125°C", Supplier Part Number 1=1292-0805B225K250CT-ND, Temperature Coefficient=X7R, Tolerance=±10%, Voltage - Rated=25V, Applications="General Purpose", Capacitance="2.2 µF", ComponentLink1Description=Datasheet, ComponentLink1URL=https://www.passivecomponent.com/wp-content/uploads/datasheet/WTC_MLCC_General_Purpose.pdf, ComponentLink2Description="DigiKey Link", ComponentLink2URL=https://www.digikey.com/en/products/detail/walsin-technology-corporation/0805B225K250CT/14836806, LastUpdated="2026-04-06 7:31:50 PM", Lifecycle Status=Active, Minimum Order=1, Mounting Type="Surface Mount, MLCC", Package / Case="0805 (2012 Metric)", Packaging=TapeAndReel, Part Number=0805B225K250CT, Part Status=Active, PartId=40661, Price=0.01, Series=-, Size / Dimension="0.079\" L x 0.049\" W (2.00mm x 1.25mm)", Supplier 1=DigiKey, Thickness (Max)="0.057\" (1.45mm)"
C2: library part 0805DC105KAT2A, "CAP CER 1UF 35V X7R 0805", Device Package="0805 (2012 Metric)", Manufacturer="KYOCERA AVX", Operating Temperature="-55°C ~ 125°C", Supplier Part Number 1=478-0805DC105KAT2ACT-ND, Temperature Coefficient=X7R, Tolerance=±10%, Voltage - Rated=35V, Applications="General Purpose", Capacitance="1 µF", ComponentLink2Description="DigiKey Link", ComponentLink2URL=https://www.digikey.com/en/products/detail/kyocera-avx/0805DC105KAT2A/11245462, LastUpdated="2026-04-06 7:32:10 PM", Lifecycle Status=Active, Minimum Order=1, Mounting Type="Surface Mount, MLCC", Package / Case="0805 (2012 Metric)", Packaging=TapeAndReel, Part Number=0805DC105KAT2A, Part Status=Active, PartId=33818, Price=0.03, Series=-, Size / Dimension="0.079\" L x 0.049\" W (2.01mm x 1.25mm)", Supplier 1=DigiKey
C3 C4 C5 C6: library part CL21B475KAFNNNE, "CAP CER 4.7UF 25V X7R 0805", Device Package="0805 (2012 Metric)", Manufacturer="Samsung Electro-Mechanics", Operating Temperature="-55°C ~ 125°C", Supplier Part Number 1=1276-2969-1-ND, Temperature Coefficient=X7R, Tolerance=±10%, Voltage - Rated=25V, Applications="General Purpose", Capacitance="4.7 µF", ComponentLink1Description=Datasheet, ComponentLink1URL=http://www.samsungsem.com/kr/support/product-search/mlcc/CL21B475KAFNNNE.jsp, ComponentLink2Description="DigiKey Link", ComponentLink2URL=https://www.digikey.com/en/products/detail/samsung-electro-mechanics/CL21B475KAFNNNE/3888627, LastUpdated="2026-04-06 7:33:17 PM", Lifecycle Status=Active, Minimum Order=1, Mounting Type="Surface Mount, MLCC", Package / Case="0805 (2012 Metric)", Packaging=TapeAndReel, Part Number=CL21B475KAFNNNE, Part Status=Active, PartId=3072, Price=0.08, Series=CL, Size / Dimension="0.079\" L x 0.049\" W (2.00mm x 1.25mm)", Supplier 1=DigiKey, Thickness (Max)="0.053\" (1.35mm)"
C7: library part CC0603ZRY5V7BB225, "CAP CER 2.2UF 16V Y5V 0603", Device Package="0603 (1608 Metric)", Manufacturer=Yageo, Operating Temperature="-30°C ~ 85°C", Supplier Part Number 1=311-3416-1-ND, Temperature Coefficient="Y5V (F)", Tolerance="-20%, +80%", Voltage - Rated=16V, Applications="General Purpose", Capacitance="2.2 µF", ComponentLink1Description=Datasheet, ComponentLink1URL=http://www.yageo.com/documents/recent/UPY-GPHC_Y5V_6.3V-to-50V_8.pdf, ComponentLink2Description="DigiKey Link", ComponentLink2URL=https://www.digikey.com/en/products/detail/yageo/CC0603ZRY5V7BB225/5883851, LastUpdated="2026-04-06 7:23:53 PM", Lifecycle Status=Active, Minimum Order=1, Mounting Type="Surface Mount, MLCC", Package / Case="0603 (1608 Metric)", Packaging=TapeAndReel, Part Number=CC0603ZRY5V7BB225, Part Status=Active, PartId=2203, Price=0.01, Series=CC, Size / Dimension="0.063\" L x 0.031\" W (1.60mm x 0.80mm)", Supplier 1=DigiKey, Thickness (Max)="0.035\" (0.90mm)"
C8: library part C0603C224J4REC7867, "CAP CER 0603 220NF 16V X7R 5%", Device Package="0603 (1608 Metric)", Manufacturer=KEMET, Operating Temperature="-55°C ~ 125°C", Supplier Part Number 1=399-C0603C224J4REC7867CT-ND, Temperature Coefficient=X7R, Tolerance=±5%, Voltage - Rated=16V, Applications="ESD Protection", Capacitance="0.22 µF", ComponentLink1Description=Datasheet, ComponentLink1URL=https://connect.kemet.com:7667/gateway/IntelliData-ComponentDocumentation/1.0/download/datasheet/C0603C224J4REC7867, ComponentLink2Description="DigiKey Link", ComponentLink2URL=https://www.digikey.com/en/products/detail/kemet/C0603C224J4REC7867/8643651, LastUpdated="2026-04-06 7:19:01 PM", Lifecycle Status=Active, Minimum Order=1, Mounting Type="Surface Mount, MLCC", Package / Case="0603 (1608 Metric)", Packaging=TapeAndReel, Part Number=C0603C224J4REC7867, PartId=56217, Price=0.02, Series="ESD SMD Comm X7R", Size / Dimension="0.063\" L x 0.031\" W (1.60mm x 0.80mm)", Supplier 1=DigiKey, Thickness (Max)="0.034\" (0.87mm)"
C9 C11 C12 C13 C14 C15: library part C0603C104K5RAC7411, "CAP CER 0.1UF 50V X7R 0603", Device Package="0603 (1608 Metric)", Manufacturer=KEMET, Operating Temperature="-55°C ~ 125°C", Supplier Part Number 1=399-C0603C104K5RAC7411CT-ND, Temperature Coefficient=X7R, Tolerance=±10%, Voltage - Rated=50V, Applications="Bypass, Decoupling", Capacitance="0.1 µF", ComponentLink1Description=Datasheet, ComponentLink1URL=https://api.kemet.com/component-edge/download/datasheet/C0603C104K5RAC7411.pdf, ComponentLink2Description="DigiKey Link", ComponentLink2URL=https://www.digikey.com/en/products/detail/kemet/C0603C104K5RAC7411/3317013, LastUpdated="2026-04-06 7:23:52 PM", Lifecycle Status=Active, Minimum Order=1, Mounting Type="Surface Mount, MLCC", Package / Case="0603 (1608 Metric)", Packaging=TapeAndReel, Part Number=C0603C104K5RAC7411, Part Status=Active, PartId=2233, Price=0.01, Series="SMD Comm X7R", Size / Dimension="0.063\" L x 0.031\" W (1.60mm x 0.80mm)", Supplier 1=DigiKey, Thickness (Max)="0.035\" (0.90mm)"
C10: library part CC0603KRX7R6BB105, "CAP CER 1UF 10V X7R 0603", Device Package="0603 (1608 Metric)", Manufacturer=Yageo, Operating Temperature="-55°C ~ 125°C", Supplier Part Number 1=311-1796-1-ND, Temperature Coefficient=X7R, Tolerance=±10%, Voltage - Rated=10V, Applications="General Purpose", Capacitance="1 µF", ComponentLink1Description=Datasheet, ComponentLink1URL=https://www.yageo.com/upload/media/product/productsearch/datasheet/mlcc/UPY-GPHC_X7R_6.3V-to-50V_18.pdf, ComponentLink2Description="DigiKey Link", ComponentLink2URL=https://www.digikey.com/en/products/detail/yageo/CC0603KRX7R6BB105/5195204, LastUpdated="2026-04-06 7:23:52 PM", Lifecycle Status=Active, Minimum Order=1, Mounting Type="Surface Mount, MLCC", Package / Case="0603 (1608 Metric)", Packaging=TapeAndReel, Part Number=CC0603KRX7R6BB105, Part Status=Active, PartId=2290, Price=0.02, Series=CC, Size / Dimension="0.063\" L x 0.031\" W (1.60mm x 0.80mm)", Supplier 1=DigiKey, Thickness (Max)="0.035\" (0.90mm)"
D1: library part 5990110007F, "LED RED 0805 SMD", Current - Test=20mA, Device Package="0805 (2012 Metric)", Lens Color=0.80mm, Manufacturer=Dialight, Millicandela Rating=29mcd, Supplier Device Package=0805, Supplier Part Number 1=350-4353-1-ND, Voltage - Forward (Vf) (Typ)=2.1V, Color=Red, ComponentLink1Description=Datasheet, ComponentLink1URL=http://www.dialightsignalsandcomponents.com/Assets/Brochures_And_Catalogs/Indication/CBI_SMD_new/Dialight_CBI_data_599-0805_Apr2018.pdf, ComponentLink2Description="DigiKey Link", ComponentLink2URL=https://www.digikey.com/en/products/detail/dialight/5990110007F/9385408, Configuration=Standard, Height (Max)=0.80mm, LastUpdated="2026-04-05 8:38:27 PM", Lens Size="1.40mm x 1.25mm", Lens Style="Rectangle with Flat Top", Lifecycle Status=Active, Minimum Order=1, Mounting Type="Surface Mount", Package / Case="0805 (2012 Metric)", Packaging=TapeAndReel, Part Number=5990110007F, Part Status=Active, PartId=308, Price=0.04, Series=599, Size / Dimension="2.00mm L x 1.25mm W", Supplier 1=DigiKey, Viewing Angle=140°, Wavelength - Dominant=633nm
D2: library part IN-S85AT5B, "LED BLUE CLEAR 0805 SMD", Current - Test=5mA, Device Package="0805 (2012 Metric)", Lens Color=Colorless, Manufacturer=Inolux, Millicandela Rating=80mcd, Supplier Device Package=0805, Supplier Part Number 1=1830-IN-S85AT5BCT-ND, Voltage - Forward (Vf) (Typ)=3V, Color=Blue, ComponentLink1Description=Datasheet, ComponentLink1URL=http://www.inolux-corp.com/datasheet/SMDLED/Mono%20Color%20Top%20View/IN-S85AT%20Series_V1.1.pdf, ComponentLink2Description="DigiKey Link", ComponentLink2URL=https://www.digikey.com/en/products/detail/inolux/IN-S85AT5B/7604912, Configuration=Standard, Height (Max)=1.10mm, LastUpdated="2026-04-05 8:35:18 PM", Lens Size="1.40mm x 1.25mm", Lens Style="Rectangle with Flat Top", Lens Transparency=Clear, Lifecycle Status=Active, Minimum Order=1, Mounting Type="Surface Mount", Package / Case="0805 (2012 Metric)", Packaging=TapeAndReel, Part Number=IN-S85AT5B, Part Status=Active, PartId=751, Price=0.04, Series=IN-S85AT, Size / Dimension="2.00mm L x 1.25mm W", Supplier 1=DigiKey, Viewing Angle=120°, Wavelength - Dominant=470nm, Wavelength - Peak=473nm
D3 D8: "TVS DIODE 5V 8.9V DO219AB", Capacitance @ Frequency="2095pF @ 1MHz", Current - Peak Pulse (10/1000µs)=42.95A, Manufacturer="Vishay Semiconductor Diodes Division", Operating Temperature="-55°C ~ 175°C (TJ)", Package / Case=DO-219AB, Power - Peak Pulse=400W, Power Line Protection=No, Supplier Device Package="DO-219AB (SMF)", Supplier Part Number 1=VTVS5V0ASMF-HM3-08GICT-ND, Voltage - Breakdown (Min)=6.4V, Voltage - Clamping (Max) @ Ipp=8.9V, Voltage - Reverse Standoff (Typ)=5V, Applications=Automotive, ComponentLink1Description=Datasheet, ComponentLink1URL=http://www.vishay.com/docs/85891/vtvs3v3asmf.pdf, ComponentLink2Description="DigiKey Link", ComponentLink2URL=http://digikey.com/product-detail/en/vishay-semiconductor-diodes-division/VTVS5V0ASMF-HM3-08/VTVS5V0ASMF-HM3-08GICT-ND/7056002, LastUpdated="2026-04-05 9:00:09 PM", Lifecycle Status=Active, Minimum Order=1, Mounting Type="Surface Mount", Packaging=TapeAndReel, Part Number=VTVS5V0ASMF-HM3-08, Part Status=Active, PartId=5532, Price=0.12, Series="Automotive, AEC-Q101, TransZorb®", Supplier 1=DigiKey, Type=Zener, Unidirectional Channels=1
D4 D5 D6 D7 D9: "DIODE SCHOTTKY 20V 2A DO214AA", Current - Average Rectified (Io)=2A, Current - Reverse Leakage @ Vr="400µA @ 20V", Manufacturer="ON Semiconductor", Operating Temperature - Junction="-65°C ~ 125°C", Package / Case="DO-214AA, SMB", Supplier Device Package="DO-214AA (SMB)", Supplier Part Number 1=SS22FSCT-ND, Voltage - DC Reverse (Vr) (Max)=20V, Voltage - Forward (Vf) (Max) @ If="500mV @ 2A", ComponentLink1Description=Datasheet, ComponentLink1URL=https://www.onsemi.com/pub/Collateral/SS29-D.pdf, ComponentLink2Description="DigiKey Link", ComponentLink2URL=http://digikey.com/product-detail/en/on-semiconductor/SS22/SS22FSCT-ND/3504400, Diode Type=Schottky, LastUpdated="2026-04-05 8:31:00 PM", Lifecycle Status=Active, Minimum Order=1, Mounting Type="Surface Mount", Packaging=TapeAndReel, Part Number=SS22, Part Status=Active, PartId=1568, Price=0.15, Series=-, Speed="Fast Recovery =< 500ns, > 200mA (Io)", Supplier 1=DigiKey
D10: library part 5975316507F, "LED GREEN 0805 SMD", Current - Test=20mA, Device Package="0805 (2012 Metric)", Lens Color=0.93mm, Manufacturer=Dialight, Millicandela Rating=16mcd, Supplier Device Package=0805, Supplier Part Number 1=350-4389-1-ND, Voltage - Forward (Vf) (Typ)=2.2V, Color=Green, ComponentLink1Description=Datasheet, ComponentLink1URL=http://www.dialightsignalsandcomponents.com/Assets/Drawings/2D_Drawings_DrawingDetailedSpec/NewDrawings/18370A.pdf, ComponentLink2Description="DigiKey Link", ComponentLink2URL=https://www.digikey.com/en/products/detail/dialight/5975316507F/9385444, Configuration=Standard, Height (Max)=0.93mm, LastUpdated="2026-04-05 8:39:04 PM", Lens Size="1.40mm x 1.24mm", Lens Style="Rectangle with Flat Top", Lifecycle Status=Active, Minimum Order=1, Mounting Type="Surface Mount", Package / Case="0805 (2012 Metric)", Packaging=TapeAndReel, Part Number=5975316507F, Part Status=Active, PartId=245, Price=0.14, Series=597, Size / Dimension="2.00mm L x 1.25mm W", Supplier 1=DigiKey, Wavelength - Dominant=560nm
J1 J3: "CONN HEADER VERT 2POS 2MM", Current Rating (Amps)=2A, Insulation Color=Natural, Manufacturer="JST Sales America Inc.", Material Flammability Rating="UL94 V-0", Operating Temperature="-25°C ~ 85°C", Supplier Part Number 1=455-1704-ND, Voltage Rating=100V, ComponentLink1Description=Datasheet, ComponentLink1URL=http://www.jst-mfg.com/product/pdf/eng/ePH.pdf, ComponentLink2Description="DigiKey Link", ComponentLink2URL=http://digikey.com/product-detail/en/jst-sales-america-inc/B2B-PH-K-S-LF-SN/455-1704-ND/926611, Connector Type=Header, Contact Finish - Mating=Tin, Contact Finish - Post=Tin, Contact Length - Mating="0.130\" (3.30mm)", Contact Length - Post="0.134\" (3.40mm)", Contact Material=Brass, Contact Shape=Square, Contact Type="Male Pin", Fastening Type="Detent Lock", Insulation Height="0.236\" (6.00mm)", Insulation Material="Polyamide (PA66), Nylon 6/6", LastUpdated="2020-01-03 11:40:58 PM", Lifecycle Status=Active, Minimum Order=1, Mounting Type="Through Hole", Number of Positions=2, Number of Positions Loaded=All, Number of Rows=1, Overall Contact Length="0.333\" (8.45mm)", Packaging=Bulk, Part Number=B2B-PH-K-S(LF)(SN), Part Status=Active, PartId=11, Pitch - Mating="0.079\" (2.00mm)", Price=0.17, Series=PH, Shrouding="Shrouded - 4 Wall", Style="Board to Cable/Wire", Supplier 1=DigiKey, Termination="Press-Fit, Solder"
J2: "CONN RCP USB3.1 TYPEC 24P SMD RA", Current Rating (Amps)="0.25A, 1A, 5A", Manufacturer=Molex, Operating Temperature="-30°C ~ 85°C", Supplier Part Number 1=WM12856CT-ND, Voltage - Rated=30VAC/DC, ComponentLink1Description=Datasheet, ComponentLink1URL=https://www.molex.com/pdm_docs/ps/PS-105448-001.pdf, ComponentLink2Description="DigiKey Link", ComponentLink2URL=http://digikey.com/product-detail/en/molex/1054500101/WM12856CT-ND/5843891, Connector Type="USB - C (Type - C)", Gender=Receptacle, LastUpdated="2020-06-06 2:14:04 AM", Lifecycle Status=Active, Mating Cycles=10000, Minimum Order=1, Mounting Feature=Horizontal, Mounting Type="Surface Mount, Right Angle; Through Hole", Number of Contacts=24, Number of Ports=1, Packaging=TapeAndReel, Part Number=1054500101, Part Status=Active, Price=1.22, Series=105445, Shielding=Shielded, Specifications="USB 3.1 (USB 3.1 Gen 2, Superspeed+)", Supplier 1=DigiKey, Termination=Solder
J4: "CONN HEADER VERT 4POS 2.54MM", Insulation Color=Natural, Manufacturer=Molex, Material Flammability Rating="UL94 V-0", Supplier Part Number 1=WM4113-ND, ComponentLink1Description=Datasheet, ComponentLink1URL=https://www.molex.com/pdm_docs/sd/022272041_sd.pdf, ComponentLink2Description="DigiKey Link", ComponentLink2URL=http://digikey.com/product-detail/en/molex/0022272041/WM4113-ND/1130579, Connector Type=Header, Contact Finish - Mating=Tin, Contact Finish - Post=Tin, Contact Finish Thickness - Mating="100.0µin (2.54µm)", Contact Length - Mating="0.295\" (7.49mm)", Contact Length - Post="0.140\" (3.56mm)", Contact Material=Brass, Contact Shape=Square, Contact Type="Male Pin", Fastening Type="Friction Lock", Insulation Height="0.461\" (11.70mm)", Insulation Material="Polyamide (PA), Nylon", LastUpdated="2020-01-12 11:52:05 PM", Lifecycle Status=Active, Minimum Order=1, Mounting Type="Through Hole", Number of Positions=4, Number of Positions Loaded=All, Number of Rows=1, Overall Contact Length="0.560\" (14.22mm)", Packaging=Bulk, Part Number=0022272041, Part Status=Active, PartId=78, Pitch - Mating="0.100\" (2.54mm)", Price=0.40, Series="KK 6410", Shrouding="Shrouded - 1 Wall", Style="Board to Cable/Wire", Supplier 1=DigiKey, Termination=Solder
J5 J9: "CONN HEADER VERT 6POS 2.54MM", Insulation Color=Natural, Manufacturer=Molex, Material Flammability Rating="UL94 V-0", Supplier Part Number 1=WM4115-ND, ComponentLink1Description=Datasheet, ComponentLink1URL=https://www.molex.com/pdm_docs/sd/022272061_sd.pdf, ComponentLink2Description="DigiKey Link", ComponentLink2URL=http://digikey.com/product-detail/en/molex/0022272061/WM4115-ND/1130581, Connector Type=Header, Contact Finish - Mating=Tin, Contact Finish - Post=Tin, Contact Finish Thickness - Mating="100.0µin (2.54µm)", Contact Length - Mating="0.295\" (7.49mm)", Contact Length - Post="0.140\" (3.56mm)", Contact Material=Brass, Contact Shape=Square, Contact Type="Male Pin", Fastening Type="Friction Lock", Insulation Height="0.461\" (11.70mm)", Insulation Material="Polyamide (PA), Nylon", LastUpdated="2020-01-12 11:52:24 PM", Lifecycle Status=Active, Minimum Order=1, Mounting Type="Through Hole", Number of Positions=6, Number of Positions Loaded=All, Number of Rows=1, Overall Contact Length="0.560\" (14.22mm)", Packaging=Bulk, Part Number=0022272061, Part Status=Active, PartId=80, Pitch - Mating="0.100\" (2.54mm)", Price=0.49, Series="KK 6410", Shrouding="Shrouded - 1 Wall", Style="Board to Cable/Wire", Supplier 1=DigiKey, Termination=Solder
J6 J7: "CONN HEADER VERT 10POS 2.54MM", Insulation Color=Natural, Manufacturer=Molex, Material Flammability Rating="UL94 V-0", Supplier Part Number 1=WM4119-ND, ComponentLink1Description=Datasheet, ComponentLink1URL=https://www.molex.com/pdm_docs/sd/022272101_sd.pdf, ComponentLink2Description="DigiKey Link", ComponentLink2URL=http://digikey.com/product-detail/en/molex/0022272101/WM4119-ND/1130585, Connector Type=Header, Contact Finish - Mating=Tin, Contact Finish - Post=Tin, Contact Finish Thickness - Mating="100.0µin (2.54µm)", Contact Length - Mating="0.295\" (7.49mm)", Contact Length - Post="0.140\" (3.56mm)", Contact Material=Brass, Contact Shape=Square, Contact Type="Male Pin", Fastening Type="Friction Lock", Insulation Height="0.461\" (11.70mm)", Insulation Material="Polyamide (PA), Nylon", LastUpdated="2020-01-12 11:53:02 PM", Lifecycle Status=Active, Minimum Order=1, Mounting Type="Through Hole", Number of Positions=10, Number of Positions Loaded=All, Number of Rows=1, Overall Contact Length="0.560\" (14.22mm)", Packaging=Bulk, Part Number=0022272101, Part Status=Active, PartId=84, Pitch - Mating="0.100\" (2.54mm)", Price=0.73, Series="KK 6410", Shrouding="Shrouded - 1 Wall", Style="Board to Cable/Wire", Supplier 1=DigiKey, Termination=Solder
J8: "CONN MICRO SD CARD PUSH-PUSH R/A", Manufacturer="Hirose Electric Co Ltd", Supplier Part Number 1=HR1964TR-ND, Card Type="Secure Digital - microSD™", ComponentLink1Description=Datasheet, ComponentLink1URL=https://www.hirose.com/product/document?clcode=CL0609-0033-6-00&productname=DM3AT-SF-PEJ2M5&series=DM3&documenttype=Catalog&lang=en&documentid=D49662_en, ComponentLink2Description="DigiKey Link", ComponentLink2URL=//digikey.com/product-detail/en/hirose-electric-co-ltd/DM3AT-SF-PEJM5/HR1964TR-ND/2533565, Connector Type="Connector and Ejector", Contact Finish=Gold, Features=Switch, Height Above Board="0.066\" (1.68mm)", Insertion, Removal Method="Push In, Push Out", LastUpdated="2019-12-16 8:34:40 PM", Lifecycle Status=0, Minimum Order=1, Mounting Feature="Normal, Standard - Top", Mounting Type="Surface Mount, Right Angle", Number of Positions="10 (8 + 2)", Packaging=TapeAndReel, Part Number=DM3AT-SF-PEJM5, Part Status=Active, Price=1.41, Series=DM3, Supplier 1=DigiKey
R1 R2 R15: library part AC0603FR-7W470RL, "RES 470 OHM 1% 1/5W 0603", Device Package="0603 (1608 Metric)", Manufacturer=Yageo, Operating Temperature="-55°C ~ 155°C", Power (Watts)="0.2W, 1/5W", Ratings=AEC-Q200, Resistance="470 Ohms", Supplier Device Package=0603, Supplier Part Number 1=13-AC0603FR-7W470RLCT-ND, Temperature Coefficient=±100ppm/°C, Tolerance=±1%, ComponentLink1Description=Datasheet, ComponentLink1URL=https://www.yageo.com/upload/media/product/productsearch/datasheet/rchip/PYu-AC_51_RoHS_L_10.pdf, ComponentLink2Description="DigiKey Link", ComponentLink2URL=https://www.digikey.com/en/products/detail/yageo/AC0603FR-7W470RL/16993211, Composition="Thick Film", Features="Automotive AEC-Q200, Moisture Resistant", Height - Seated (Max)="0.022\" (0.55mm)", LastUpdated="2026-04-06 7:43:15 PM", Lifecycle Status=Active, Minimum Order=1, Number of Terminations=2, Package / Case="0603 (1608 Metric)", Packaging=TapeAndReel, Part Number=AC0603FR-7W470RL, PartId=87159, Price=0.01, Series=AC, Size / Dimension="0.063\" L x 0.031\" W (1.60mm x 0.80mm)", Supplier 1=DigiKey
R3 R4 R7 R8 R22 R23 R24 R25 R26 R27 R28: library part TLRZ2ATTD, "RES 0 OHM JUMPER 0805", Device Package="0805 (2012 Metric)", Manufacturer="KOA Speer Electronics, Inc.", Operating Temperature="-65°C ~ 170°C", Ratings=AEC-Q200, Resistance="0 Ohms", Supplier Device Package=0805, Supplier Part Number 1=2019-TLRZ2ATTDCT-ND, Tolerance=Jumper, ComponentLink1Description=Datasheet, ComponentLink1URL=http://www.koaspeer.com/catimages/Products/TLRZ/TLRZ.pdf, ComponentLink2Description="DigiKey Link", ComponentLink2URL=https://www.digikey.com/en/products/detail/koa-speer-electronics-inc/TLRZ2ATTD/9845494, Composition="Metal Element", Features="Automotive AEC-Q200, Current Sense", Height - Seated (Max)="0.022\" (0.55mm)", LastUpdated="2026-04-05 8:11:26 PM", Lifecycle Status=Active, Minimum Order=1, Number of Terminations=2, Package / Case="0805 (2012 Metric)", Packaging=TapeAndReel, Part Number=TLRZ2ATTD, Part Status=Active, PartId=27685, Price=0.08, Series=TLRZ, Size / Dimension="0.079\" L x 0.049\" W (2.00mm x 1.25mm)", Supplier 1=DigiKey
R5 R6: library part AC0603FR-075K1L, "RES SMD 5.1K OHM 1% 1/10W 0603", Device Package="0603 (1608 Metric)", Manufacturer=Yageo, Operating Temperature="-55°C ~ 155°C", Power (Watts)="0.1W, 1/10W", Ratings=AEC-Q200, Resistance="5.1 kOhms", Supplier Device Package=0603, Supplier Part Number 1=YAG3621CT-ND, Temperature Coefficient=±100ppm/°C, Tolerance=±1%, ComponentLink1Description=Datasheet, ComponentLink1URL=https://www.yageo.com/upload/media/product/productsearch/datasheet/rchip/PYu-AC_51_RoHS_L_7.pdf, ComponentLink2Description="DigiKey Link", ComponentLink2URL=https://www.digikey.com/en/products/detail/yageo/AC0603FR-075K1L/5896209, Composition="Thick Film", Features="Automotive AEC-Q200, Moisture Resistant", Height - Seated (Max)="0.022\" (0.55mm)", LastUpdated="2026-04-06 7:43:48 PM", Lifecycle Status=Active, Minimum Order=1, Number of Terminations=2, Package / Case="0603 (1608 Metric)", Packaging=CutTape, Part Number=AC0603FR-075K1L, Part Status=Active, PartId=17442, Price=0.01, Series=AC, Size / Dimension="0.063\" L x 0.031\" W (1.60mm x 0.80mm)", Supplier 1=DigiKey
R9: library part RL-1220-4-R050-FNH, "RES 0.05 OHM 1% 1/2W 0805", Device Package="0805 (2012 Metric)", Manufacturer="Delta Electronics/Cyntec", Operating Temperature="-55°C ~ 170°C", Power (Watts)="0.5W, 1/2W", Resistance="50 mOhms", Supplier Device Package=0805, Supplier Part Number 1=2037-RL-1220-4-R050-FNHCT-ND, Temperature Coefficient=±100ppm/°C, Tolerance=±1%, ComponentLink1Description=Datasheet, ComponentLink1URL=http://www.cyntec.com/upfile/products/download/RL-1220-4.pdf, ComponentLink2Description="DigiKey Link", ComponentLink2URL=http://digikey.com/product-detail/en/delta-electronics-cyntec/RL-1220-4-R050-FNH/2037-RL-1220-4-R050-FNHCT-ND/10446138, Composition="Metal Foil", Features="Current Sense", Height - Seated (Max)="0.041\" (1.05mm)", LastUpdated="2026-04-05 8:11:17 PM", Lifecycle Status=Active, Minimum Order=1, Number of Terminations=2, Package / Case="0805 (2012 Metric)", Packaging=TapeAndReel, Part Number=RL-1220-4-R050-FNH, Part Status=Active, PartId=29837, Price=0.17, Series=RL-1220, Size / Dimension="0.079\" L x 0.051\" W (2.00mm x 1.30mm)", Supplier 1=DigiKey
R10: library part AC0603FR-7W2KL, "RES 2K OHM 1% 1/5W 0603", Device Package="0603 (1608 Metric)", Manufacturer=Yageo, Operating Temperature="-55°C ~ 155°C", Power (Watts)="0.2W, 1/5W", Ratings=AEC-Q200, Resistance="2 kOhms", Supplier Device Package=0603, Supplier Part Number 1=13-AC0603FR-7W2KLCT-ND, Temperature Coefficient=±100ppm/°C, Tolerance=±1%, ComponentLink1Description=Datasheet, ComponentLink1URL=https://www.yageo.com/upload/media/product/productsearch/datasheet/rchip/PYu-AC_51_RoHS_L_10.pdf, ComponentLink2Description="DigiKey Link", ComponentLink2URL=https://www.digikey.com/en/products/detail/yageo/AC0603FR-7W2KL/16990990, Composition="Thick Film", Features="Automotive AEC-Q200, Moisture Resistant", Height - Seated (Max)="0.022\" (0.55mm)", LastUpdated="2026-04-06 7:42:46 PM", Lifecycle Status=Active, Minimum Order=1, Number of Terminations=2, Package / Case="0603 (1608 Metric)", Packaging=TapeAndReel, Part Number=AC0603FR-7W2KL, PartId=91069, Price=0.01, Series=AC, Size / Dimension="0.063\" L x 0.031\" W (1.60mm x 0.80mm)", Supplier 1=DigiKey
R11 R12 R16 R29 R30: library part AA0603FR-0710KL, "RES SMD 10K OHM 1% 1/10W 0603", Device Package="0603 (1608 Metric)", Manufacturer=Yageo, Operating Temperature="-55°C ~ 155°C", Power (Watts)="0.1W, 1/10W", Ratings=AEC-Q200, Resistance="10 kOhms", Supplier Device Package=0603, Supplier Part Number 1=13-AA0603FR-0710KLCT-ND, Temperature Coefficient=±150ppm/°C, Tolerance=±1%, ComponentLink1Description=Datasheet, ComponentLink1URL=https://www.yageo.com/upload/media/product/productsearch/datasheet/rchip/PYu-AA_51_RoHS_L_3.pdf, ComponentLink2Description="DigiKey Link", ComponentLink2URL=https://www.digikey.com/en/products/detail/yageo/AA0603FR-0710KL/5888698, Composition="Thick Film", Features="Anti-Sulfur, Automotive AEC-Q200, Moisture Resistant", Height - Seated (Max)="0.022\" (0.55mm)", LastUpdated="2026-04-06 7:43:37 PM", Lifecycle Status=Active, Minimum Order=1, Number of Terminations=2, Package / Case="0603 (1608 Metric)", Packaging=TapeAndReel, Part Number=AA0603FR-0710KL, Part Status=Active, PartId=64302, Price=0.01, Series=AA, Size / Dimension="0.063\" L x 0.031\" W (1.60mm x 0.80mm)", Supplier 1=DigiKey
R13: library part AA0603FR-071KL, "RES SMD 1K OHM 1% 1/10W 0603", Device Package="0603 (1608 Metric)", Manufacturer=Yageo, Operating Temperature="-55°C ~ 155°C", Power (Watts)="0.1W, 1/10W", Ratings=AEC-Q200, Resistance="1 kOhms", Supplier Device Package=0603, Supplier Part Number 1=13-AA0603FR-071KLCT-ND, Temperature Coefficient=±150ppm/°C, Tolerance=±1%, ComponentLink1Description=Datasheet, ComponentLink1URL=https://www.yageo.com/upload/media/product/productsearch/datasheet/rchip/PYu-AA_51_RoHS_L_3.pdf, ComponentLink2Description="DigiKey Link", ComponentLink2URL=https://www.digikey.com/en/products/detail/yageo/AA0603FR-071KL/5888847, Composition="Thick Film", Features="Anti-Sulfur, Automotive AEC-Q200, Moisture Resistant", Height - Seated (Max)="0.022\" (0.55mm)", LastUpdated="2026-04-06 7:43:37 PM", Lifecycle Status=Active, Minimum Order=1, Number of Terminations=2, Package / Case="0603 (1608 Metric)", Packaging=TapeAndReel, Part Number=AA0603FR-071KL, Part Status=Active, PartId=64335, Price=0.01, Series=AA, Size / Dimension="0.063\" L x 0.031\" W (1.60mm x 0.80mm)", Supplier 1=DigiKey
R14: library part AT0603BRD07200KL, "RES SMD 200K OHM 0.1% 1/10W 0603", Device Package="0603 (1608 Metric)", Manufacturer=Yageo, Operating Temperature="-55°C ~ 155°C", Power (Watts)="0.1W, 1/10W", Ratings=AEC-Q200, Resistance="200 kOhms", Supplier Device Package=0603, Supplier Part Number 1=13-AT0603BRD07200KLCT-ND, Temperature Coefficient=±25ppm/°C, Tolerance=±0.1%, ComponentLink1Description=Datasheet, ComponentLink1URL=https://www.yageo.com/upload/media/product/app/datasheet/rchip/pyu-at_51_rohs_l.pdf, ComponentLink2Description="DigiKey Link", ComponentLink2URL=https://www.digikey.com/en/products/detail/yageo/AT0603BRD07200KL/5907576, Composition="Thin Film", Features="Anti-Sulfur, Automotive AEC-Q200, Moisture Resistant", Height - Seated (Max)="0.022\" (0.55mm)", LastUpdated="2026-04-06 7:43:01 PM", Lifecycle Status=Active, Minimum Order=1, Number of Terminations=2, Package / Case="0603 (1608 Metric)", Packaging=TapeAndReel, Part Number=AT0603BRD07200KL, PartId=91209, Price=0.07, Series=AT, Size / Dimension="0.063\" L x 0.031\" W (1.60mm x 0.80mm)", Supplier 1=DigiKey
R17 R18 R19 R20 R21: library part AC0603FR-0747KL, "RES SMD 47K OHM 1% 1/10W 0603", Device Package="0603 (1608 Metric)", Manufacturer=Yageo, Operating Temperature="-55°C ~ 155°C", Power (Watts)="0.1W, 1/10W", Ratings=AEC-Q200, Resistance="47 kOhms", Supplier Device Package=0603, Supplier Part Number 1=YAG3610CT-ND, Temperature Coefficient=±100ppm/°C, Tolerance=±1%, ComponentLink1Description=Datasheet, ComponentLink1URL=https://www.yageo.com/upload/media/product/productsearch/datasheet/rchip/PYu-AC_51_RoHS_L_7.pdf, ComponentLink2Description="DigiKey Link", ComponentLink2URL=https://www.digikey.com/en/products/detail/yageo/AC0603FR-0747KL/5896142, Composition="Thick Film", Features="Automotive AEC-Q200, Moisture Resistant", Height - Seated (Max)="0.022\" (0.55mm)", LastUpdated="2026-04-06 7:43:48 PM", Lifecycle Status=Active, Minimum Order=1, Number of Terminations=2, Package / Case="0603 (1608 Metric)", Packaging=CutTape, Part Number=AC0603FR-0747KL, Part Status=Active, PartId=17391, Price=0.01, Series=AC, Size / Dimension="0.063\" L x 0.031\" W (1.60mm x 0.80mm)", Supplier 1=DigiKey
S1: "SWITCH TACTILE SPST-NO 0.05A 24V", Contact Rating @ Voltage="0.05A @ 24VDC", Manufacturer="TE Connectivity ALCOSWITCH Switches", Operating Force=180gf, Operating Temperature="-35°C ~ 85°C", Supplier Part Number 1=450-1758-1-ND, Actuator Height off PCB, Vertical=4.57mm, Actuator Orientation="Top Actuated", Actuator Type=Standard, Circuit=SPST-NO, ComponentLink1Description=Datasheet, ComponentLink1URL=https://www.te.com/commerce/DocumentDelivery/DDEController?Action=srchrtrv&DocNm=1437566-3&DocType=Customer+Drawing&DocLang=English, ComponentLink2Description="DigiKey Link", ComponentLink2URL=https://www.digikey.com/en/products/detail/te-connectivity-alcoswitch-switches/FSMSMTR/529671, Illumination=Non-Illuminated, LastUpdated="2026-04-05 8:58:52 PM", Lifecycle Status=Active, Minimum Order=1, Mounting Type="Surface Mount", Outline="6.00mm x 3.50mm", Packaging=TapeAndReel, Part Number=FSMSMTR, Part Status=Active, Price=0.20, Series=FSMSM, Supplier 1=DigiKey, Switch Function=Off-Mom, Termination Style="Gull Wing"
TP1 TP2 TP3 TP4 TP5 TP6 TP7 TP8 TP15 TP16 TP17: library part CMP-2000-05178-1, "Test Point, 1-Pin SMT, RoHS, Tape and Reel", Manufacturer=Keystone, Package Description="1-Pin Test Point, Body 3.81 x 2.04 mm", Standard Package=1, Catalog Drawings="5016Top /  / 5016Side /  / 5016Front", Category=TestandMeasurement, Datasheet URL=https://ciiva.com/datasheet-click-2917613?src=ciiva&sig=4a4e90f, Datasheet Version="Rev. D, 03/2014", Family=TestPoints, Featured Product="SurfaceMountTestPoints /  / 5019MiniatureSurfaceMountTestPoint", Manufacturer URL=http://www.keyelco.com/, Material=PhosphorBronze, Mounting Type=SurfaceMount, Online Catalog=SurfaceMountTestPoints, Other Names=5016KDKR, Package Reference=5016, Packaging=Digi-Reel, RoHS Information=RoHSComplianceStatement, Terminal="0.015\"(0.38mm)PhosphorBronze,SilverPlated", Type=PCTestPoint,Compact
U1: library part CMP-0136-00458-1, "500 mA, Low Voltage, Low Quiescent Current LDO Regulator, 3-Pin SOT-223, Extended Temperature", DatasheetVersion="revB, Feb-2008", PackageDescription="3-Lead Plastic Small Outline Transistor (DB) [SOT-223]", PackageReference=SOT-223-DB3, PackageVersion="revBB, Aug-2009"